# Altium PCB PCB1.PcbDoc
Units mil, origin at the board's own origin, x right, y up, seen from the top; angles counter-clockwise.
Board outline 2600 x 2600 mil, 4 copper layers (Top Layer, Layer 1, Layer 2, Bottom Layer), stack 68.756 mil thick; 22 components, 108 nets, 300 pads, 190 vias.
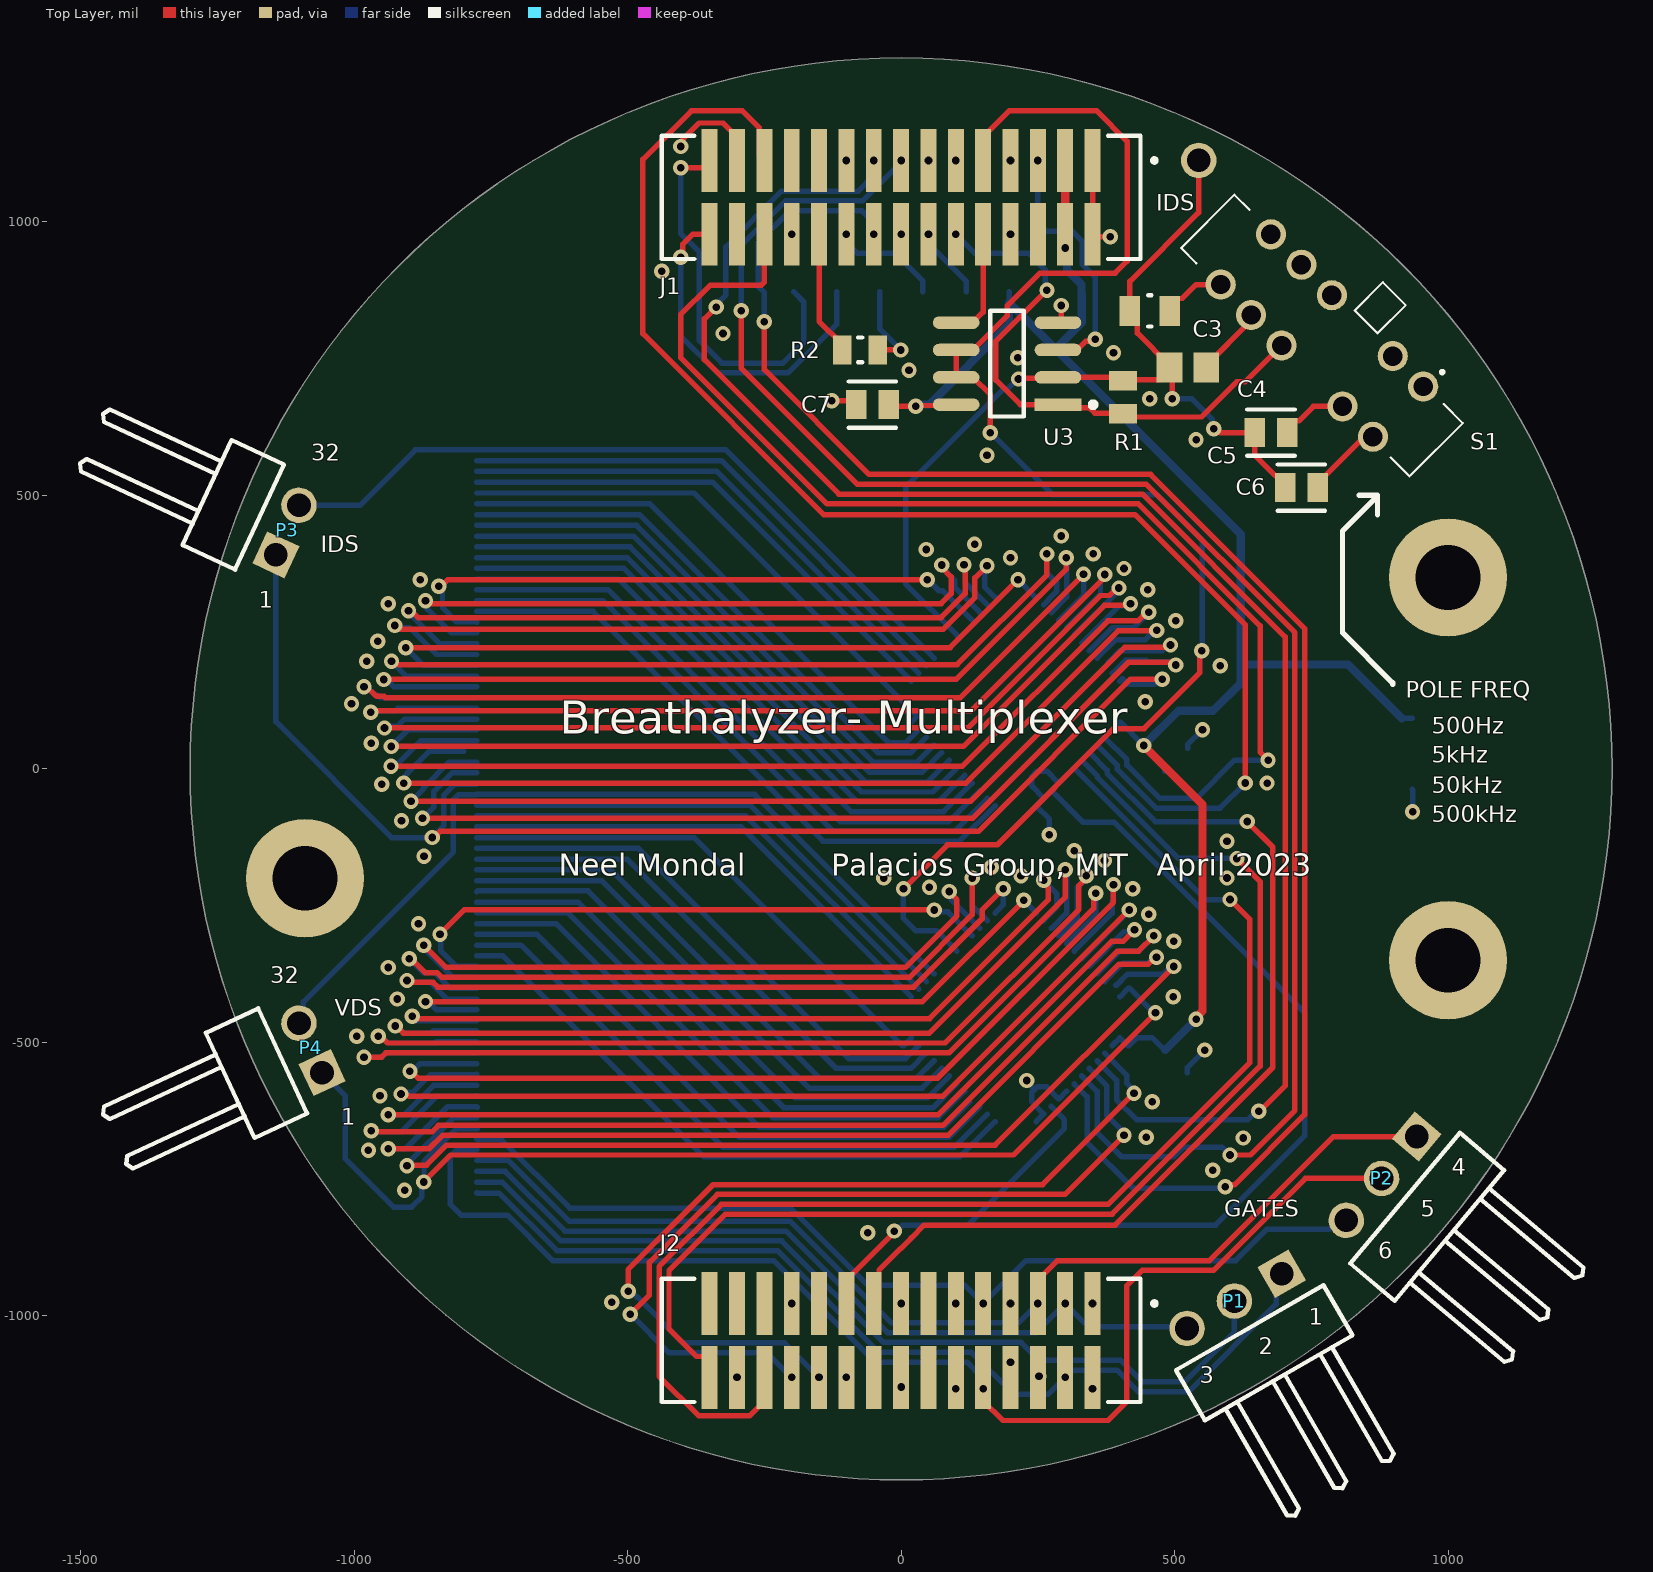
[diagram p0: Top Layer view]
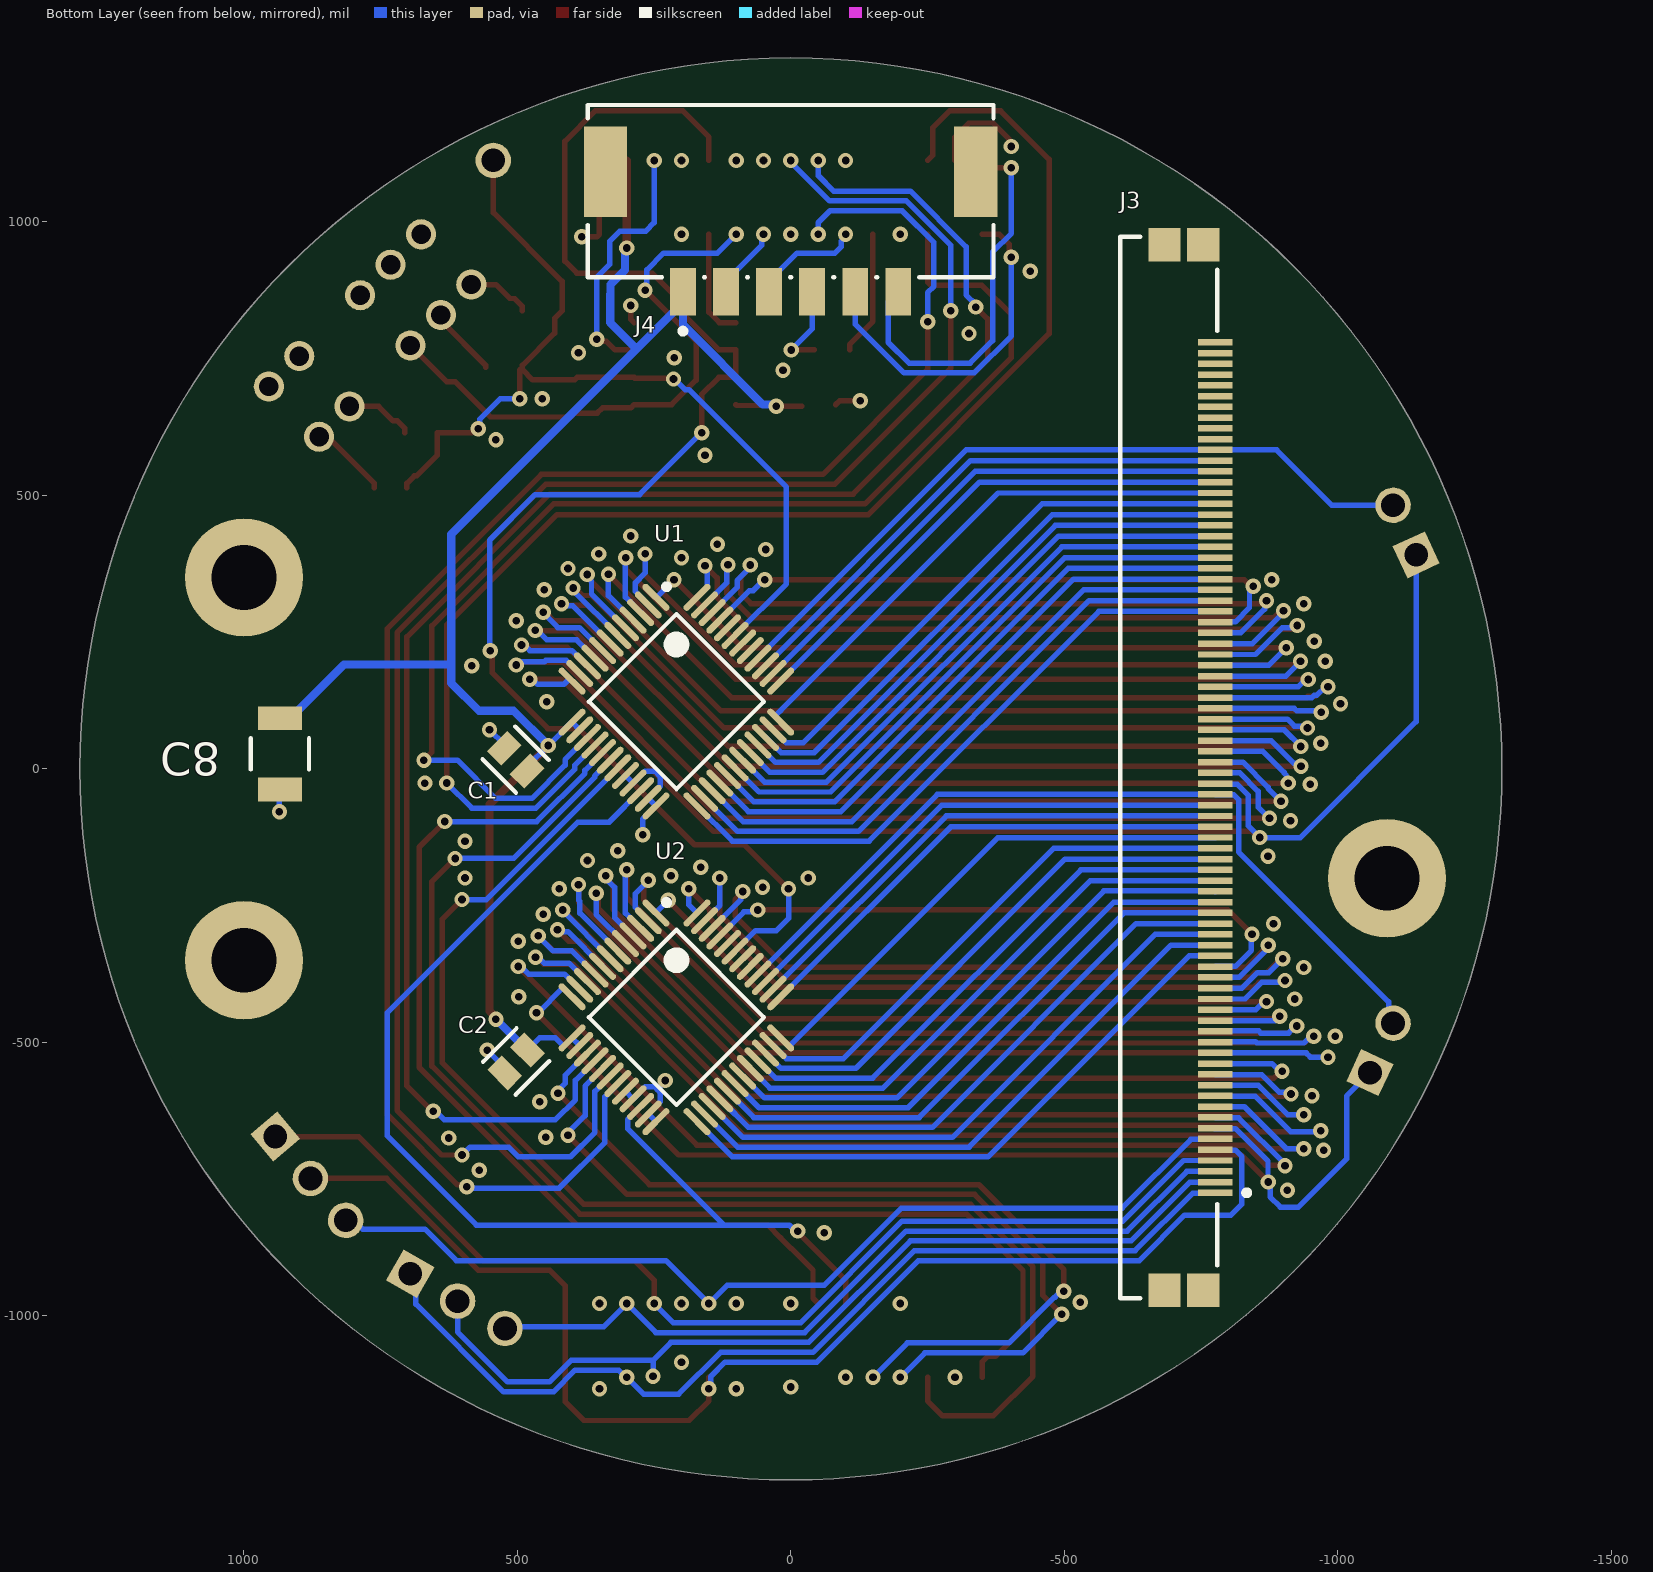
[diagram p1: Bottom Layer view, seen from below]
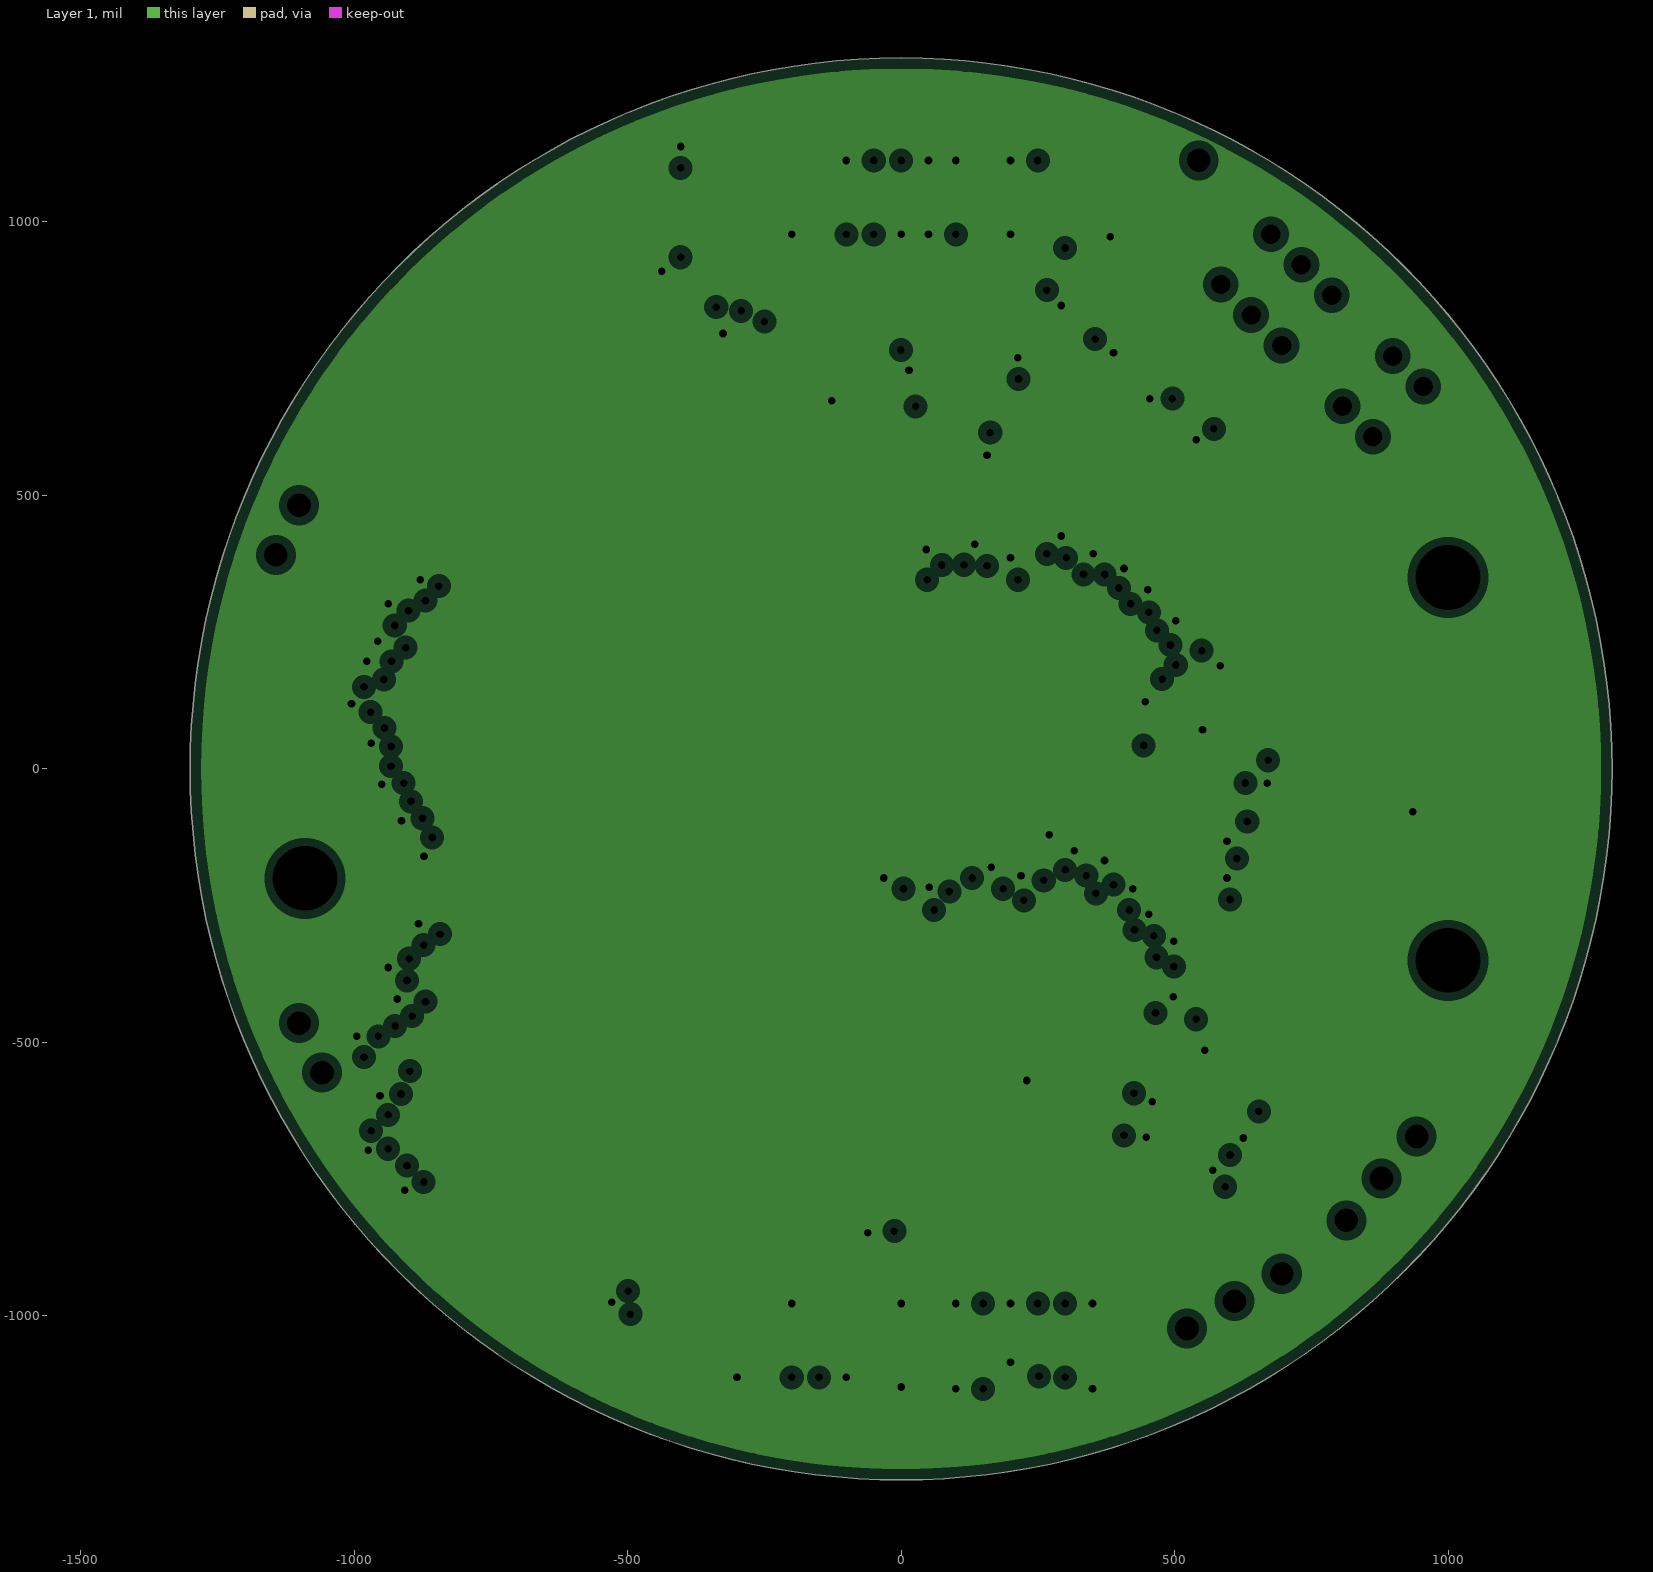
[diagram p2: Layer 1, clearances drawn from the general rule]
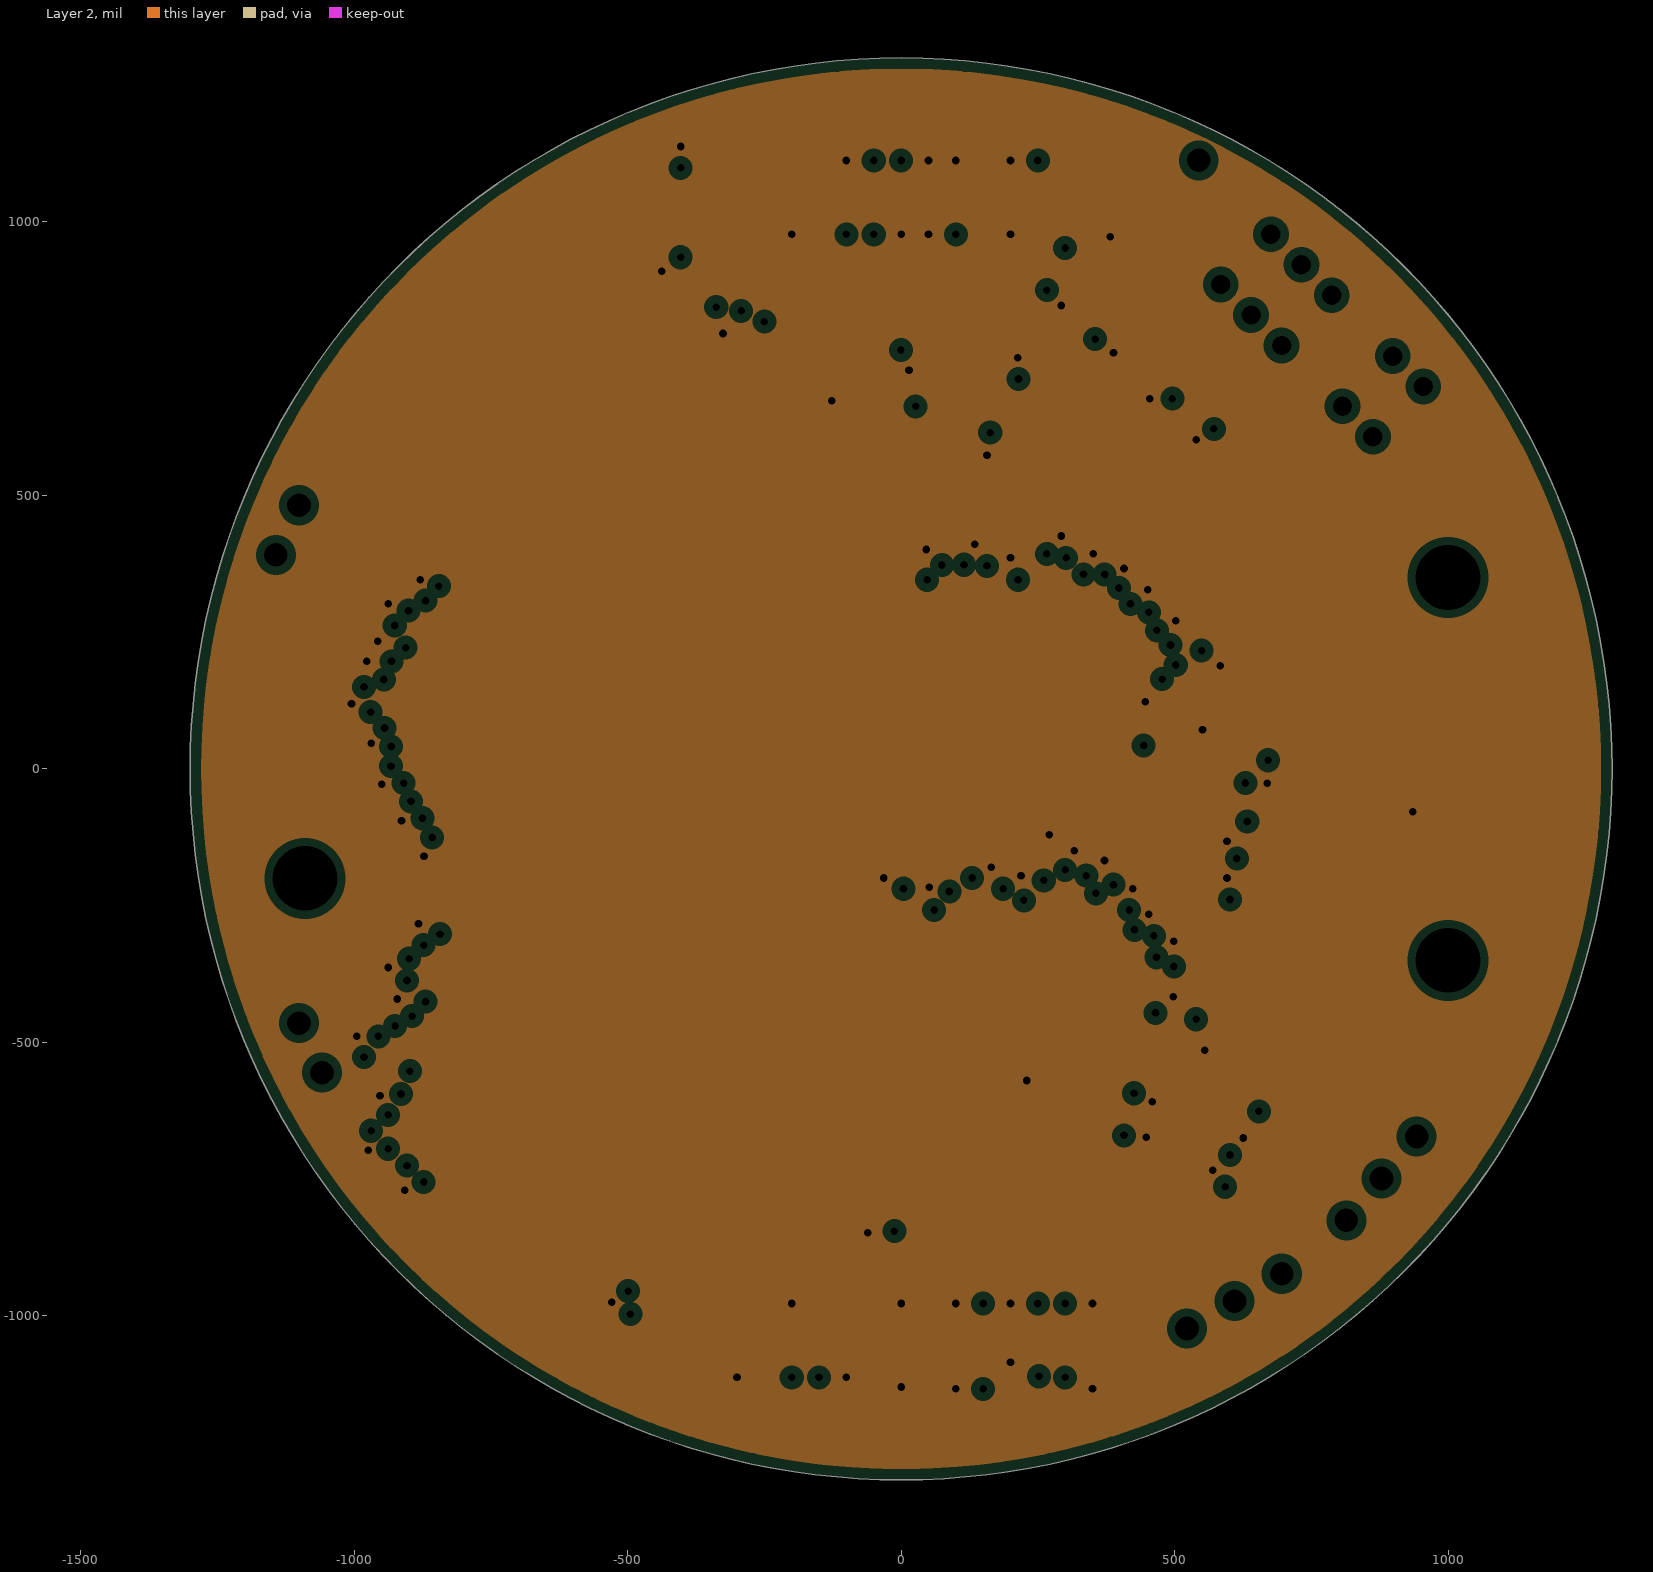
[diagram p3: Layer 2, clearances drawn from the general rule]
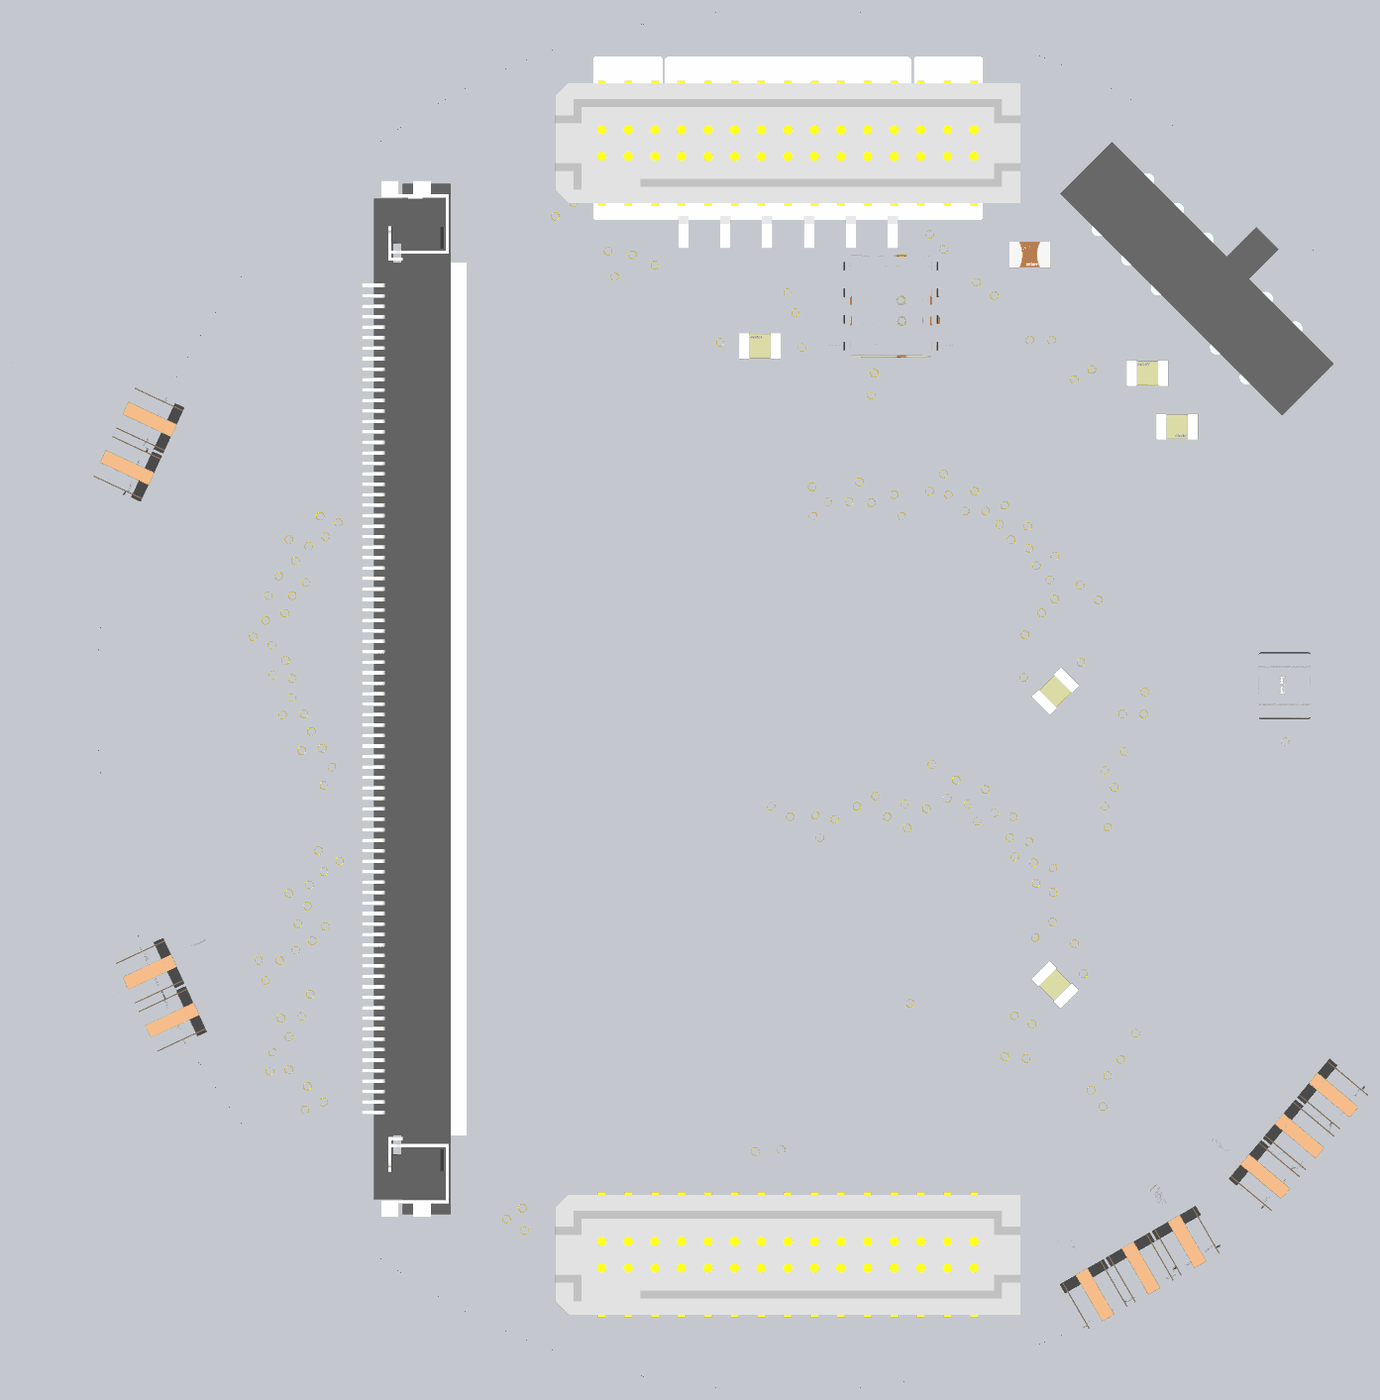
[diagram p4: 3D render of the assembled board from above, using the file's embedded part models]
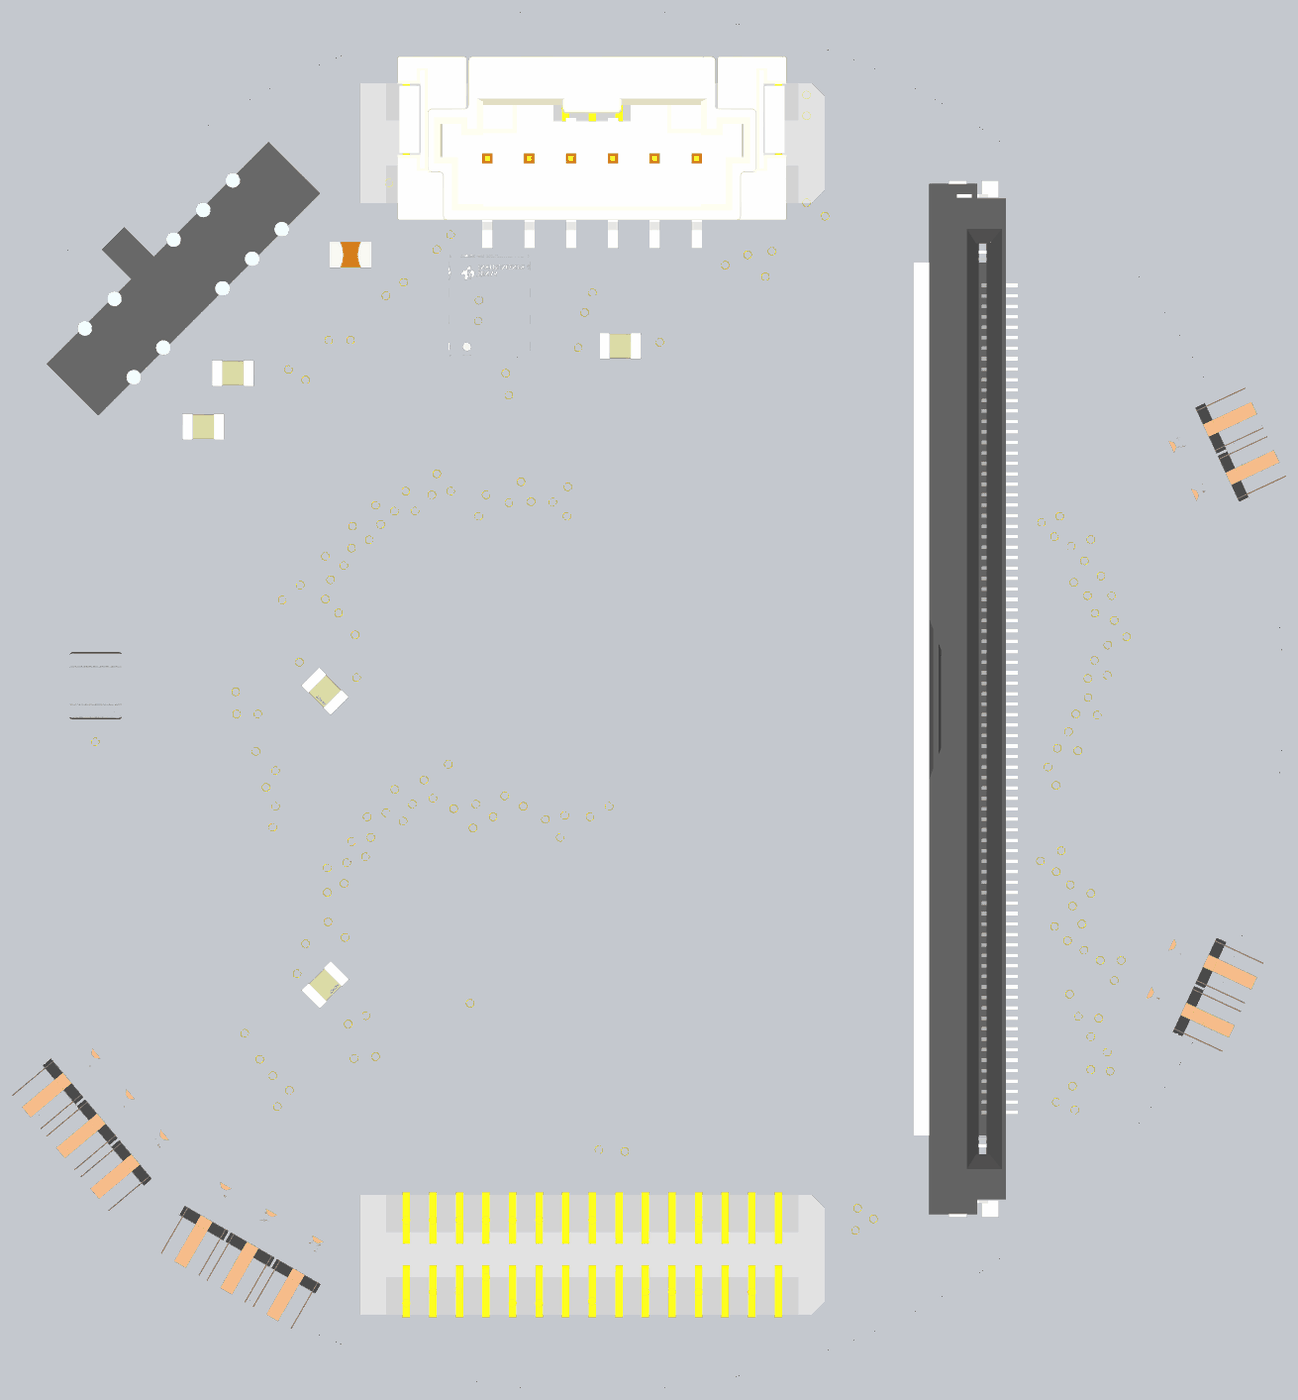
[diagram p5: 3D render of the assembled board from below, using the file's embedded part models]

## Layer stack, top to bottom
Top Solder: solder mask 0.5, Solder Resist, Dk 3.3
Top Layer: signal copper 0.7
Dielectric 1: prepreg 2.8, PP-006, Dk 4.1
Layer 1: plane copper 1.378, net GND
Dielectric1: core 59, FR-4, Dk 4.3
Layer 2: plane copper 1.378, net GND
Dielectric 2: prepreg 2.8, PP-006, Dk 4.1
Bottom Layer: signal copper 0.7
Bottom Solder: solder mask 0.5, Solder Resist, Dk 3.3

## Board outline
-1300,0 ccw(c0,0) 0,-1300 ccw(c0,0) 1300,0 ccw(c0,0) 0,1300 ccw(c0,0)

## Design rules (kind name [scope] priority, off if disabled: settings)
Clearance [All] p1: gap=8 ignorepadtopadclearanceinfootprint=FALSE except(6: Arc-SMDPad Track-SMDPad SMDPad-SMDPad; 12: Arc-Via Track-Via)
DiffPairsRouting [All] p1: maxlimit=10 minlimit=10 mostfreqgap=10 toplayer_minwidth=10 toplayer_maxwidth=10 toplayer_prefwidth=10 bottomlayer_minwidth=10 bottomlayer_maxwidth=10 bottomlayer_prefwidth=10 maxuncoupledlength=500
HoleSize [All] p1: absolutevalues=TRUE maxlimit=300 minlimit=14 maxpercent=80.000 minpercent=20.000
MinimumAnnularRing [All] p1: minimumring=7
MinimumSolderMaskSliver [All] p1: minsoldermaskwidth=0
PasteMaskExpansion [All] p1: expansion=10
PlaneClearance [All] p1: clearance=15
PlaneConnect [All] p1: pad.planeconnectstyle=Relief pad.reliefexpansion=20 pad.reliefentries=4 pad.reliefconductorwidth=10 pad.reliefairgap=10 via.planeconnectstyle=Direct via.reliefexpansion=20 via.reliefentries=4 via.reliefconductorwidth=10 via.reliefairgap=10
PolygonConnect [All] p1: thpad.connectstyle=Relief thpad.reliefconductorwidth=10 thpad.reliefentries=4 thpad.polygonreliefangle="90 Angle" thpad.airgapwidth=10 smdpad.connectstyle=Relief smdpad.reliefconductorwidth=10 smdpad.reliefentries=4 smdpad.polygonreliefangle="90 Angle" smdpad.airgapwidth=10 via.connectstyle=Direct via.reliefconductorwidth=10 via.reliefentries=4 via.polygonreliefangle="90 Angle" via.airgapwidth=10
RoutingVias [All] p1: holewidth=14 width=28 viastyle="Through Hole" minholewidth=14 minwidth=28 maxholewidth=14 maxwidth=28
SMDNeckDown [All] p1: percent=100.000
SilkToSolderMaskClearance SilkscreenOverComponentPads [IsPad] p1: minsilkscreentomaskgap=6 clearancetoexposedcopper=TRUE
SolderMaskExpansion [All] p1: expansion=10 istentingtop=FALSE
Width [All] p1: maxlimit=15 minlimit=8 preferedwidth=8
23 further rules are at their usual default settings.

## Components (designator, comment, footprint, x,y, rotation, side; value= is the part's Value field where it differs from the comment)
C1 "100 nF" FP-C0805C-DN-MFG 503.17,16.93 r45 bottom value="0.10 μF"
C2 "100 nF" FP-C0805C-DN-MFG 502.48,-535.01 r315 bottom value="0.10 μF"
C3 "330nF" FP-CC0805-0_85-MFG 454.89,837.55 r0 top value="330 nF"
C4 "33nF" CAPC2013X95X45NL10T25 524.49,734 r0 top
C5 "3.3nF" FP-C0805C-DN-MFG 676.21,614.89 r0 top value="3,300 pF"
C6 "330pF" FP-C0805C-DN-MFG 731.89,514.2 r180 top value="330 pF"
C7 "100 nF" FP-C0805C-DN-MFG -52.48,666 r0 top value="0.10 μF"
C8 "22uF" FP-GRM32-MFG 934.27,27.37 r270 bottom
J1 "TFM-115-02-L-D" SAMTEC_TFM-115-02-L-D 0,1045 r180 top locked
J2 "TFM-115-02-L-D" SAMTEC_TFM-115-02-L-D 0,-1045 r180 top locked
J3 "200485-0580" FP-200485-0580-MFG -690.96,2.49 r270 bottom locked
J4 "5600200620" FP-5600200620-MFG 0.58,1056.57 r0 bottom locked
P1 "DNP" 61300311021 663.97,-1067.6 r30 top locked
P2 "DNP" 61300311021 962,-819 r50 top locked
P3 "DNP" 61300211021 -1220.97,482.77 r245 top locked
P4 "DNP" 61300211021 -1178.71,-556.24 r295 top locked
R1 "1k" RESC2013X55X40LL15T20 405.85,679.55 r270 top
R2 "100" RESC2013X50X30LL20T20 -75.02,766 r180 top
S1 "SSSS212400" SSSS212400 954.6,699.09 r135 top locked
U1 "ADG732BSUZ-REEL" ADI-SU-48_N 209.3,123.04 r225 bottom
U2 "ADG732BSUZ-REEL" ADI-SU-48_N 209.3,-454.31 r225 bottom
U3 "OPA2388IDR" FP-D0008A-IPC_B 193.71,741 r180 top

## Footprints (in the part's own frame and the unit in brackets; to place one, negate y for a bottom-side part, rotate by r counter-clockwise, add the part's x,y. Pads: shape width x height; smd on the part's side, far side on the other; paste and mask are expansions set on the pad)
61300211021 [mm] "Pin Header, pitch 2.54 mm, THT, Angled, single row, 2p"
  rect 1.65x1.65 hole 1.1: 1(1.27,2.77)
  round 1.65 hole 1.1: 2(-1.27,2.77)
  silkscreen extent -2.69,-7.27 2.69,1.35, body extent -2.54,-7.27 2.54,3.09, height 2.58
61300311021 [mm] "Pin Header, pitch 2.54 mm, THT, Angled, single row, 3p"
  rect 1.65x1.65 hole 1.1: 1(2.54,2.77)
  round 1.65 hole 1.1: 2(0,2.77) 3(-2.54,2.77)
  silkscreen extent -3.96,-7.27 3.96,1.34, body extent -3.81,-7.27 3.81,3.09, height 2.58
ADI-SU-48_N [mm] "QFP, 48-Leads, Body 7x7mm, Pitch 0.5mm, IPC Medium Density"
  oval 1.65x0.3 smd: 1(-4.1,2.75) 2(-4.1,2.25) 3(-4.1,1.75) 4(-4.1,1.25) 5(-4.1,0.75) 6(-4.1,0.25) 7(-4.1,-0.25) 8(-4.1,-0.75) 9(-4.1,-1.25) 10(-4.1,-1.75) 11(-4.1,-2.25) 12(-4.1,-2.75) 25(4.1,-2.75) 26(4.1,-2.25) 27(4.1,-1.75) 28(4.1,-1.25) 29(4.1,-0.75) 30(4.1,-0.25) 31(4.1,0.25) 32(4.1,0.75) 33(4.1,1.25) 34(4.1,1.75) 35(4.1,2.25) 36(4.1,2.75)
  oval 0.3x1.65 smd: 13(-2.75,-4.1) 14(-2.25,-4.1) 15(-1.75,-4.1) 16(-1.25,-4.1) 17(-0.75,-4.1) 18(-0.25,-4.1) 19(0.25,-4.1) 20(0.75,-4.1) 21(1.25,-4.1) 22(1.75,-4.1) 23(2.25,-4.1) 24(2.75,-4.1) 37(2.75,4.1) 38(2.25,4.1) 39(1.75,4.1) 40(1.25,4.1) 41(0.75,4.1) 42(0.25,4.1) 43(-0.25,4.1) 44(-0.75,4.1) 45(-1.25,4.1) 46(-1.75,4.1) 47(-2.25,4.1) 48(-2.75,4.1)
  silkscreen extent -4.22,-2.88 2.88,3.57, body extent -3.5,-3.5 3.5,3.5, height 1.2
CAPC2013X95X45NL10T25 [mm] "Chip Capacitor, 2-Leads, Body 2.00x1.25mm, IPC Medium Density"
  rect 1.2x1.4 smd: 1(-0.85,0) 2(0.85,0)
  body extent -1.05,-0.67 1.05,0.67, height 0.95
FP-200485-0580-MFG [mm]
  rect 0.3x1.6 smd paste-1000 mask+0: 1(19.75,2.16) 2(19.25,2.16) 3(18.75,2.16) 4(18.25,2.16) 5(17.75,2.16) 6(17.25,2.16) 7(16.75,2.16) 8(16.25,2.16) 9(15.75,2.16) 10(15.25,2.16) 11(14.75,2.16) 12(14.25,2.16) 13(13.75,2.16) 14(13.25,2.16) 15(12.75,2.16) 16(12.25,2.16) 17(11.75,2.16) 18(11.25,2.16) 19(10.75,2.16) 20(10.25,2.16) 21(9.75,2.16) 22(9.25,2.16) 23(8.75,2.16) 24(8.25,2.16) 25(7.75,2.16) 26(7.25,2.16) 27(6.75,2.16) 28(6.25,2.16) 29(5.75,2.16) 30(5.25,2.16) 31(4.75,2.16) 32(4.25,2.16) 33(3.75,2.16) 34(3.25,2.16) 35(2.75,2.16) 36(2.25,2.16) 37(1.75,2.16) 38(1.25,2.16) 39(0.75,2.16) 40(0.25,2.16) 41(-0.25,2.16) 42(-0.75,2.16) 43(-1.25,2.16) 44(-1.75,2.16) 45(-2.25,2.16) 46(-2.75,2.16) 47(-3.25,2.16) 48(-3.75,2.16) 49(-4.25,2.16) 50(-4.75,2.16) 51(-5.25,2.16) 52(-5.75,2.16) 53(-6.25,2.16) 54(-6.75,2.16) 55(-7.25,2.16) 56(-7.75,2.16) 57(-8.25,2.16) 58(-8.75,2.16) 59(-9.25,2.16) 60(-9.75,2.16) 61(-10.25,2.16) 62(-10.75,2.16) 63(-11.25,2.16) 64(-11.75,2.16) 65(-12.25,2.16) 66(-12.75,2.16) 67(-13.25,2.16) 68(-13.75,2.16) 69(-14.25,2.16) 70(-14.75,2.16) 71(-15.25,2.16) 72(-15.75,2.16) 73(-16.25,2.16) 74(-16.75,2.16) 75(-17.25,2.16) 76(-17.75,2.16) 77(-18.25,2.16) 78(-18.75,2.16) 79(-19.25,2.16) 80(-19.75,2.16)
  rect 1.55x1.5 smd paste+0 mask+0: 81(-24.275,1.6) 82(24.275,1.6) 83(-24.275,-0.2) 84(24.275,-0.2)
  silkscreen extent -24.65,-2.26 24.65,3.74, body extent -24.74,-2.21 24.75,2.79, height 5.7
FP-5600200620-MFG [mm]
  rect 1.2x2.2 smd paste+0 mask+0: 1(5,4.68) 2(3,4.68) 3(1,4.68) 4(-1,4.68) 5(-3,4.68) 6(-5,4.68)
  rect 2x4.2 smd paste+0 mask+0: 7(-8.6,-0.9) 8(8.6,-0.9)
  silkscreen extent -9.43,-4 9.43,6.63, body extent -9.3,-3.9 9.3,5.25, height 8.2
FP-C0805C-DN-MFG [mm]
  rect 0.95x1.35 smd paste+0 mask+0: 1(-0.75,0) 2(0.75,0)
  silkscreen extent -1.1,-1.07 1.1,1.08, body extent -1,-0.62 1,0.63, height 0.88
FP-CC0805-0_85-MFG [mm]
  rect 0.95x1.4 smd paste+0 mask+0: 1(-0.925,0) 2(0.925,0)
  silkscreen extent -0.08,-0.72 0.08,0.72, body extent -1.6,-1.05 1.6,1.05, height 0.25
FP-D0008A-IPC_B [mil]
  rect 85.4x22.92 smd paste+0 mask+0: 1(-93.06,75)
  rrect100% 85.4x22.92 smd paste+0 mask+0: 2(-93.06,25) 3(-93.06,-25) 4(-93.06,-75) 5(93.06,-75) 6(93.06,-25) 7(93.06,25) 8(93.06,75)
  silkscreen extent -162,-97 31,97, body extent -146,-106 146,106, height 10
FP-GRM32-MFG [mm]
  rect 1.1x2.05 smd paste+0 mask+0: 1(-1.65,0) 2(1.65,0)
  silkscreen extent -0.72,-1.35 0.72,1.35, body extent -1.6,-1.25 1.6,1.25, height 2.7
RESC2013X50X30LL20T20 [mm] "Chip Resistor, 2-Leads, Body 2.00x1.25mm, IPC High Density"
  rect 0.85x1.35 smd: 1(-0.825,0) 2(0.825,0)
  silkscreen extent -0.1,-0.58 0.1,0.58, body extent -1.1,-0.73 1.1,0.73, height 0.5
RESC2013X55X40LL15T20 [mm] "Chip Resistor, 2-Leads, Body 2.00x1.25mm, IPC High Density"
  rect 0.9x1.3 smd: 1(-0.775,0) 2(0.775,0)
  body extent -1.07,-0.7 1.07,0.7, height 0.55
SAMTEC_TFM-115-02-L-D [mm]
  rect 0.74x2.92 smd: 01(-8.89,-1.715) 02(-8.89,1.715) 03(-7.62,-1.715) 04(-7.62,1.715) 05(-6.35,-1.715) 06(-6.35,1.715) 07(-5.08,-1.715) 08(-5.08,1.715) 09(-3.81,-1.715) 10(-3.81,1.715) 11(-2.54,-1.715) 12(-2.54,1.715) 13(-1.27,-1.715) 14(-1.27,1.715) 15(0,-1.715) 16(0,1.715) 17(1.27,-1.715) 18(1.27,1.715) 19(2.54,-1.715) 20(2.54,1.715) 21(3.81,-1.715) 22(3.81,1.715) 23(5.08,-1.715) 24(5.08,1.715) 25(6.35,-1.715) 26(6.35,1.715) 27(7.62,-1.715) 28(7.62,1.715) 29(8.89,-1.715) 30(8.89,1.715)
  silkscreen extent -11.87,-2.86 11.11,2.86, body extent -11.11,-3.05 11.11,2.92, height 5.71
SSSS212400 [mm]
  round 1.4 hole 0.9: 1(0,0) 2(2,0) 3(6,0) 4(8,0) 5(10,0) 6(0,3.3) 7(2,3.3) 8(6,3.3) 9(8,3.3) 10(10,3.3)
  silkscreen extent -2.5,-2.1 12.5,3.4, body extent -2.5,-2.1 12.5,3.65, height 3.6

## Part data
C1 C2 C7: library part CMP-2007-00279-2, "CAP CER 0.1UF 50V X7R 0805", Capacitance="0.10 μF", Manufacturer=KEMET, Manufacturer Part Number=C0805C104K5RACTU, Package=C0805C-DN, Temperature="-55°C to +125°C", Temperature Characteristic=X7R, Temperature Coefficient=30ppm/°C, Temperature Range High=+125°C, Temperature Range Low=-55°C, Tolerance=0.1, Voltage Rating="50 V", Automotive=No, Category=Cap, ComponentLink2Description=Datasheet, ComponentLink2URL=https://content.kemet.com/datasheets/KEM_C1003_C0G_SMD.pdf, Device Class L1="Passive Components", Device Class L2=Capacitors, Device Class L3="Ceramic Capacitors", Digikey Description="CAP CER 0.1UF 50V X7R 0805", Height=0.88mm, Ipc Land Pattern Name=CAPC200125X78, Lead Free=Yes, Material=Ceramic, Mouser Description="Cap Ceramic 0.1uF 50V X7R 10% SMD 2.0 x 1.2 mm 125 C Paper T/R", Octopart=https://octopart.com/c0805c104k5ractu-kemet-143926, RoHS=TRUE
C3: library part CMP-03422-000882-1, "Surface Mount Ceramic Multilayer Capacitor 0.33uF 10% X7R 16V 0805 Blister T/R", Capacitance="330 nF", Manufacturer=Yageo, Manufacturer Part Number=CC0805KKX7R7BB334, Package=CC0805-0.85, Temperature="-30°C to +85°C", Temperature Characteristic=X7R, Temperature Range High=+85°C, Temperature Range Low=-30°C, Tolerance=0.1, Voltage Rating="16 V", Automotive=No, Category=Cap, ComponentLink2Description=Datasheet, ComponentLink2URL=http://www.yageo.com/documents/recent/UPY-GPHC_Y5V_6.3V-to-50V_8.pdf, Device Class L1="Passive Components", Device Class L2=Capacitors, Device Class L3="Ceramic Capacitors", Digikey Description="Surface Mount Ceramic Multilayer Capacitor 0.33uF 10% X7R 16V 0805 Blister T/R", Footprint Url=http://www.yageo.com/exep/pages/download/literatures/UPY-C_GEN_24.pdf, Height=0.95mm, Ipc Land Pattern Name=CAPC200125X85, Lead Free=Yes, Material=Ceramic, Mouser Description="Multilayer Ceramic Capacitors MLCC - SMD/SMT 330nF 16V X7R 10%", Octopart=https://octopart.com/cc0805kkx7r7bb334-yageo-42334127, RoHS=TRUE
C4: library part CMP-1036-04169-2, Manufacturer=Murata, Part Number=GRM219R71H333KA01D
C5: library part CMP-2007-00373-2, "CAP CER 3300PF 50V X7R 0805", Capacitance="3,300 pF", Manufacturer=KEMET, Manufacturer Part Number=C0805C332K5RACTU, Package=C0805C-DN, Temperature="-55°C to +125°C", Temperature Characteristic=X7R, Temperature Coefficient=30ppm/°C, Temperature Range High=+125°C, Temperature Range Low=-55°C, Tolerance=0.1, Voltage Rating="50 V", Automotive=No, Category=Cap, ComponentLink2Description=Datasheet, ComponentLink2URL=https://content.kemet.com/datasheets/KEM_C1003_C0G_SMD.pdf, Device Class L1="Passive Components", Device Class L2=Capacitors, Device Class L3="Ceramic Capacitors", Digikey Description="CAP CER 3300PF 50V X7R 0805", Height=0.88mm, Ipc Land Pattern Name=CAPC200125X78, Lead Free=Yes, Material=Ceramic, Mouser Description="Multilayer Ceramic Capacitors MLCC - SMD/SMT 50volts 3300pF X7R 10%", Octopart=https://octopart.com/c0805c332k5ractu-kemet-90782, RoHS=TRUE
C6: library part CMP-2007-00598-2, "CAP CER 330PF 50V C0G/NP0 0805", Capacitance="330 pF", Manufacturer=KEMET, Manufacturer Part Number=C0805C331J5GACTU, Package=C0805C-DN, Temperature="-55°C to +125°C", Temperature Characteristic=C0G, Temperature Coefficient=30ppm/°C, Temperature Range High=+125°C, Temperature Range Low=-55°C, Tolerance=0.05, Voltage Rating="50 V", Automotive=No, Category=Cap, ComponentLink2Description=Datasheet, ComponentLink2URL=https://content.kemet.com/datasheets/KEM_C1003_C0G_SMD.pdf, Device Class L1="Passive Components", Device Class L2=Capacitors, Device Class L3="Ceramic Capacitors", Digikey Description="CAP CER 330PF 50V C0G/NP0 0805", Height=0.88mm, Ipc Land Pattern Name=CAPC200125X78, Lead Free=Yes, Material=Ceramic, Mouser Description="Ceramic Capacitor 330Pf 50V, C0G, 5%, 0805, Full Reel", Octopart=https://octopart.com/c0805c331j5gactu-kemet-85885, RoHS=TRUE
C8: library part CMP-2000-05458-2, "CAP CER 22UF 25V X5R 1210", Manufacturer="Murata Electronics North America", Manufacturer Part Number=GRM32ER61E226KE15L, Operating Temperature="-55°C ~ 85°C", Package=GRM32, Package / Case="1210 (3225 Metric)", Standard Package=1,000, Temperature="-55°C to +85°C", Temperature Characteristic=X5R, Temperature Range High=+85°C, Temperature Range Low=-55°C, Tolerance=10%, Voltage - Rated=25V, Applications="General Purpose", Automotive=No, Capacitance=22uF, Category=Cap, ComponentLink2Description=Datasheet, ComponentLink2URL=https://search.murata.co.jp/Ceramy/image/img/A01X/G101/ENG/GRM32ER61E226KE15-01A.pdf, Device Class L1="Passive Components", Device Class L2=Capacitors, Device Class L3="Ceramic Capacitors", Digikey Description="CAP CER 22UF 25V X5R 1210", Height=2.7mm, Lead Free=Yes, Material=Ceramic, Mounting Type="Surface Mount, MLCC", Mouser Description="Multilayer Ceramic Capacitors MLCC - SMD/SMT 1210 22uF 25volts X5R 10%", Octopart=https://octopart.com/grm32er61e226ke15l-murata-197441, Other Names=490-3889-2, Packaging="Cut Tape (CT)", Possible Substitute=GRM32ER61E226KE15K, RoHS=TRUE, Size / Dimension="0.126\" L x 0.098\" W (3.20mm x 2.50mm)", Temperature Coefficient=X5R, Thickness (Max)="0.106\" (2.70mm)", Voltage Rating=25V
J1 J2: Package=None, Availability=Unavailable, MF="Samtec Inc.", MP=TFM-115-02-L-D, Price=None, System=Connector
J3: library part CMP-04775-000018-1, "0.5 ONE-TOUCH ST 80P", System=Connector
J4: library part CMP-04776-000066-1, "CONN HEADER SMD 6POS 2MM", Current Rating=3A, Manufacturer=Molex, Temperature="-40°C to +125°C", Temperature Range High=+125°C, Temperature Range Low=-40°C, Voltage Rating=125V, Automotive=No, Category=Conn, ComponentLink2Description=Datasheet, ComponentLink2URL=https://www.molex.com/webdocs/datasheets/pdf/en-us/5600200320_PCB_HEADERS.pdf, Conn Gender=Male, Conn Orientation=Vertical, Contact Material=Tin,Nickel, Device Class L1=Connectors, Device Class L2="Headers and Wire Housings", Device Class L3=unset, Digikey Description="CONN HEADER SMD 6POS 2MM", Footprint Url=https://www.molex.com/pdm_docs/sd/5600200320_sd.pdf, Height=8.2mm, Lead Free=Yes, Manufacturer Part Number=5600200620, Number of Contacts=6, Number of Rows=1, Octopart=https://octopart.com/5600200620-molex-51767481, Package=5600200620, Pitch=2mm, RoHS=TRUE
P1 P2: library part CMP-1502-01061-1, "THT Angled Pin Header WR-PHD, Pitch 2.54 mm, Single Row, 3 pins", Contact Resistance=20mOhm, Manufacturer="Wurth Elektronik", Operating Temperature=-40to105degC, Package Reference=61300311021, Rated Current=3A, Withstanding Voltage=500VAC, Working Voltage=250VAC, Datasheet URL=https://katalog.we-online.de/em/datasheet/6130xx11021.pdf, Gender=Male, Manufacturer URL=http://www.we-online.de, Mounting Technology=THT, Orientation=Angled, Packaging=Bag, Part Number=61300311021, Pin Number=3, Pitch=2.54mm, Publisher=WurthElektronik, Row Number=Single
P3 P4: library part CMP-1502-01059-1, "THT Angled Pin Header WR-PHD, Pitch 2.54 mm, Single Row, 2 pins", Contact Resistance=20mOhm, Manufacturer="Wurth Elektronik", Operating Temperature=-40to105degC, Package Reference=61300211021, Rated Current=3A, Withstanding Voltage=500VAC, Working Voltage=250VAC, Datasheet URL=https://katalog.we-online.de/em/datasheet/6130xx11021.pdf, Gender=Male, Manufacturer URL=http://www.we-online.de, Mounting Technology=THT, Orientation=Angled, Packaging=Bag, Part Number=61300211021, Pin Number=2, Pitch=2.54mm, Publisher=WurthElektronik, Row Number=Single
R1: library part CMP-2001-04738-1, "TNPW08051K00BEEN", Manufacturer="Vishay Dale", Part Number=TNPW08051K00BEEN
R2: library part CMP-2001-04901-1, Manufacturer="Vishay Dale", Part Number=CRCW0805100RFKEA
S1: "Switch", Manufacturer_Name="ALPS Electric", Mouser Part Number=688-SSSS212400, Datasheet Link=https://www.alps.com/prod/info/E/HTML/Switch/Slide/SSSS2/SSSS224100.html, Height=3.5mm, Manufacturer_Part_Number=SSSS212400, Mouser Price/Stock=https://www.mouser.com/Search/Refine.aspx?Keyword=688-SSSS212400
U1 U2: library part CMP-0798-00236-1, "1.8 to 5.5 V / +/-2.5 V, 4 Ohm, 32-Channel Analog Multiplexer, -40 to 85 degC, 48-pin QFP (SU-48), Reel", Manufacturer="Analog Devices", Bandwidth (Hz)=18M, Code_JEDEC=MS-026ABC, ComponentLink1Description="Manufacturer URL", ComponentLink1URL=http://www.analog.com/en/index.html, ComponentLink2Description=Datasheet, ComponentLink2URL=http://www.analog.com/static/imported-files/data_sheets/ADG726_732.pdf, ComponentLink3Description="Package Specification", ComponentLink3URL=http://www.analog.com/static/imported-files/packages/470644706845302410119987SU48_7x7.pdf, DatasheetVersion="Rev. 0", Max Analog Signal Range="Vss to Vdd", Mounting Technology="Surface Mount", PackageDescription="48-Pin Thin Plastic Quad Flat Package, Body 7 x 7 mm, Pitch 0.5 mm", PackageReference=SU-48, Packing=Reel, PartNumber=ADG732BSUZ-REEL, Ron (ohms)=4, Supply V Guar Performance="Dual_(+/-2.5V), Single_(+3V), Single_(+5V)", t transition (s)=23n
U3: library part CMP-04895-000483-1, "IC OPAMP ZER-DRIFT 2CIRC 8SOIC", Max Operating Temperature=125°C, Min Operating Temperature=-40°C, Number of Channels=2, RoHS Compliant=Yes

## Free pads (board coordinates)
  round 65 hole 43: 3(544.17,1112.52)
  round 216.54 hole 118.11: 4(-1090,-200) 4(1000,-350) 4(1000,350)

## Via types
v1: diameter 28, hole 14, Top Layer to Bottom Layer, tented both sides, 189 vias
v2: diameter 28, hole 14, Top Layer to Bottom Layer, 1 vias

## Nets (pads, with @x,y where several pads share a name; then routed paths per layer and width w, separated by ;. In a path a pad name is that pad's centre, name@x,y a point inside that pad or via, vN(x,y) a via of type N, cw(c..) or ccw(c..) an arc to the next point about the centre after c; other vN are vias at no path point)
1V_REF: J1.05 U3.3 | length 474.4
  Top Layer w10: U3.3 321.5,766 337.74,782.24 351.41,782.24 v1(354.86,785.68)
  Bottom Layer w10: v1(250,1112.52) 250,998.71 265.29,983.43 312.84,983.43 331,965.27 331,922.9 354.86,899.04 v1(354.86,785.68)
2V_REF: J1.06
3V3: C1.1 C2.1 C7.2 C8.1 J1.03 J1.04 J4.1 U1.13 U1.14 U2.13 U2.14 U3.8 | length 3138.8
  Top Layer w10: C7.2@-19.86,662.9 v1(26.53,662.9) 28.08,664.45 99.1,664.45 U3.8 ; v1(539.36,-457.79) v1@539.36,-454.58
  Top Layer w15: v1(300,952.43) J1.03 ; v1(443.58,42.73) 551.01,-64.69 551.01,-442.93 v1@539.36,-454.58
  Bottom Layer w10: v1(26.53,662.9) v1@29.97,666.35 ; J4.1@197.43,852.63 J4.1 ; v1(300,952.43) v1@303.44,948.98 ; 329.8,868.6 330.4,868 ; U2.14 U2.13 414.66,-506.56 415.84,-506.56 430.51,-491.89 459.36,-491.89 C2.1 C2.1@483.03,-514.13 ; U1.14 U1.13 400.85,85.46 v1(443.58,42.73) 482.29,4.02 C1.1 ; C8.1@915.56,92.33 C8.1
  Bottom Layer w15: v1@29.97,666.35 51.55,666.35 197.43,812.23 197.43,852.63 621.09,428.97 621.09,190.69 ; 282.15,767.91 330.4,816.17 330.4,868 ; v1@303.44,948.98 303.44,912.12 329.8,885.77 329.8,868.6 ; v1(443.58,42.73) 507.18,106.33 570.21,106.33 621.09,157.21 621.09,190.69 ; C2.1@483.03,-514.13 v1(539.36,-457.79) ; C8.1@915.56,92.33 817.21,190.69 621.09,190.69
5KHZ_POLE: C4.2 S1.9 | length 129.9
  Top Layer w10: C4.2 557.95,737.94 640.02,820.01 S1.9
50KHZ_POLE: C5.2 S1.7 | length 125.8
  Top Layer w10: C5.2 705.74,622.76 719.44,636.46 727.31,636.46 753.75,662.9 S1.7
500HZ_POLE: C3.2 S1.10 | length 118.1
  Top Layer w10: C3.2 491.31,846.41 505.01,860.11 513.87,860.11 539.36,885.61 S1.10
500KHZ_POLE: C6.1 S1.6 | length 144.5
  Top Layer w10: C6.1 761.42,522.08 837.93,598.59 854.1,598.59 S1.6
!ADC_CS: J1.21
!BME_CS: J1.29 J4.6 | length 714.4
  Top Layer w10: v1(-402.99,1099) -359.57,1099 -350,1108.57 J1.29
  Bottom Layer w10: v1(-402.99,1099) -402.99,979.34 -369,945.34 -369,783.27 -327.73,742 -216,742 -178,780 -178,854.05 J4.6
!CHIP_EN: J2.19 U1.22 U2.22 | length 2147.8
  Top Layer w10: J2.19 -100,-934.57 -12.4,-846.96 v1(-12.4,-845.1)
  Bottom Layer w10: v1(-12.4,-845.1) -7.99,-845.1 3.03,-834.08 122.13,-834.08 ; U2.22 274.72,-617.66 298.5,-641.43 298.5,-657.71 122.13,-834.08 ; U1.22 332.13,-97.22 389.7,-97.22 738.02,-445.54 738.02,-670.97 574.91,-834.08 122.13,-834.08
!DAC_CS: J1.23
!GATE_SHDN: J1.28
+11V: J2.13
-11V: J2.14
DRAIN_SEL0: J2.22 U2.15 | length 1607.8
  Top Layer w10: v1(-499,-955) -499,-915.62 -343.48,-760.1 258.93,-760.1 v1(425.97,-593.05)
  Bottom Layer w10: v1(-499,-955) -494.13,-955 -483.24,-965.89 -482.25,-965.89 -398.54,-1049.6 -212.92,-1049.6 v1(-150,-1112.52) ; U2.15 412.26,-559.83 412.26,-574.47 425.97,-588.18 v1(425.97,-593.05)
DRAIN_SEL1: J1.17 U2.16 | length 3102.1
  Top Layer w10: v1(-338,844.41) -359.57,822.85 -359.57,748.38 -113.62,502.43 441.2,502.43 702.02,241.61 702.02,-579.43 655.3,-626.16 v1(654.13,-626.16)
  Bottom Layer w10: v1(-338,844.41) -338,849.28 -320.45,866.83 -320.45,954.57 -218.46,1056.57 -78.06,1056.57 -50,1084.62 v1(-50,1112.52) ; U2.16 394.26,-569.67 394.26,-605.18 430.51,-641.43 633.98,-641.43 649.26,-626.16 v1(654.13,-626.16)
DRAIN_SEL2: J2.24 U2.17 | length 1564.8
  Top Layer w10: v1(-495.09,-996.89) -460.38,-962.18 -460.38,-902.45 -336.03,-778.1 299.59,-778.1 v1(407.69,-670)
  Bottom Layer w10: v1(-495.09,-996.89) -424.38,-1067.6 -244.92,-1067.6 v1(-200,-1112.52) ; U2.17 344.32,-548.06 376.26,-580 376.26,-633.79 407.69,-665.22 v1(407.69,-670)
DRAIN_SEL3: J1.15 U2.18 | length 3211.5
  Top Layer w10: v1(-292.34,837.55) -292.34,732.8 -79.98,520.43 448.65,520.43 720.02,249.06 720.02,-624.51 638.53,-706 v1(601.3,-706)
  Bottom Layer w10: v1(-292.34,837.55) -292.34,957.22 -211,1038.57 -70.6,1038.57 0,1109.17 v1(0,1112.52) ; U2.18 330.4,-561.98 358.26,-589.84 358.26,-664.41 403.44,-709.59 498.14,-709.59 516.14,-691.59 586.44,-691.59 600.85,-706 v1(601.3,-706)
DRAIN_SEL4: J1.18 U2.19 | length 3181.6
  Top Layer w10: v1(-250,817.87) -250,730.06 -58.37,538.43 456.11,538.43 738.02,256.52 738.02,-631.96 609.43,-760.56 596.04,-760.56 v1(592.59,-764)
  Bottom Layer w10: v1(-250,817.87) -250,870.82 -261.34,882.17 -261.34,962.77 -203.54,1020.57 -71.85,1020.57 -50,998.71 v1(-50,977.48) ; U2.19 316.48,-575.9 340.26,-599.68 340.26,-683.38 423.66,-766.78 589.81,-766.78 v1(592.59,-764)
GATE1: J2.04 J3.1 P1.1 | length 1783.1
  Bottom Layer w10: J3.1 -775.09,-775.98 -734.57,-775.98 -629.54,-881 -225.74,-881 -40,-1066.73 128.61,-1066.73 205.1,-1143.22 269.3,-1143.22 v1(300,-1112.52) 301.63,-1112.52 314.86,-1099.3 394.36,-1099.3 434.04,-1138.98 525.43,-1138.98 685.69,-978.72 685.69,-968.38 686.23,-967.84 686.23,-911.81 P1.1@685.69,-911.27
GATE2: J2.06 J3.2 P1.2 | length 1653.8
  Bottom Layer w10: J3.2 -775.8,-755.58 -729.5,-755.58 -622.09,-863 -218.28,-863 -32.55,-1048.73 219.34,-1048.73 252.04,-1081.43 ; v1(252.04,-1110.48) 252.04,-1081.43 ; P1.2@614.98,-981.98 609.44,-987.51 609.44,-1029.51 517.98,-1120.98 441.49,-1120.98 401.81,-1081.3 307.4,-1081.3 307.27,-1081.43 252.04,-1081.43
GATE3: J2.03 J3.3 P1.3 | length 1459.6
  Bottom Layer w10: J3.3 -723.93,-735.7 -614.63,-845 -210.83,-845 -25.09,-1030.73 246.75,-1030.73 v1(300,-977.48) 342.61,-1020.09 511.67,-1020.09 P1.3@518.79,-1027.21
GATE4: J2.05 J3.4 P2.1 | length 2007.8
  Top Layer w10: v1(250,-977.48) 250,-934.57 285.57,-899 563.83,-899 790.53,-672.3 P2.1
  Bottom Layer w10: J3.4 -718.16,-716.02 -607.18,-827 -203.37,-827 -17.64,-1012.73 214.75,-1012.73 v1(250,-977.48)
GATE5: J2.10 J3.5 P2.2 | length 2360.3
  Top Layer w10: J2.10 v1(150,-1133.5) 150,-1155.43 185.98,-1191.41 378.45,-1191.41 412.26,-1157.6 412.26,-945.34 440.6,-917 571.28,-917 739.38,-748.9 P2.2
  Bottom Layer w10: J3.5 -776.78,-697.11 -812.88,-697.11 -824.67,-708.9 -824.67,-795.74 -804.44,-815.97 -720.03,-815.97 -637,-899 -233.19,-899 -47.46,-1084.73 120.18,-1084.73 146.56,-1111.11 146.56,-1130.06 v1(150,-1133.5)
GATE6: J2.09 J3.6 P2.3 | length 1777.7
  Bottom Layer w10: J3.6 -775.22,-677.43 -731.3,-677.43 -605.72,-803 -201.91,-803 -61.13,-943.79 116.31,-943.79 v1(150,-977.48) 228.48,-899 611.67,-899 669.18,-841.49 783.32,-841.49 799.31,-825.51 P2.3
GATE_AMP: J2.21
GND: C1.2 C2.2 C7.1 C8.2 J1.01 J1.02 J1.07 J1.08 J1.11 J1.13 J1.14 J1.16 J1.19 J1.24 J1.27 J2.01 J2.02 J2.07 J2.08 J2.11 J2.12 J2.15 J2.16 J2.20 J2.23 J2.28 J4.2 U1.20 U1.21 U1.23 U1.24 U2.20 U2.21 U2.23 U2.24 U3.4 | length 1092.2
  Top Layer w10: v1(-402.99,1138) -399.55,1141.44 -399.55,1150.57 -369.12,1181 -325.57,1181 -300,1155.43 J1.27 ; v1(-127,673) -89.01,673 C7.1 ; U3.4 292.69,821.93 v1(292.69,847.4) ; J1.01 J1.02 354.52,972.96 v1(382.47,972.96)
  Bottom Layer w10: v1(50,977.48) 53.44,974.04 53.44,957.25 118.69,892 J4.2 ; v1(229.82,-569.81) 229.82,-572.26 243.98,-586.42 ; U2.24 U2.23 260.8,-630.6 239.03,-608.82 239.03,-591.37 243.98,-586.42 ; v1(270.9,-120.37) 270.9,-91.67 U1.24 U1.23 260.8,-53.24 239.03,-31.47 239.03,-14.02 248.93,-4.12 266.37,-4.12 288.15,-25.9 U1.21 U1.20 ; U2.20 U2.21 288.15,-603.25 266.37,-581.47 248.93,-581.47 243.98,-586.42 ; C2.2 523.36,-546.2 v1(555.43,-514.13) ; C1.2 524.05,44.59 v1(551.01,71.54) ; C8.2 935.23,-38.56 v2(935.23,-78.24)
  other v1: 100,-1133.5 350,-1133.5 0.44,-1130.06 -300,-1112.52 -100,-1112.52 200,-1084.73 -200,-977.48 0,-977.48 100,-977.48 200,-977.48 350,-977.48 -529,-975 -61.13,-848.42 -907.86,-770.34 570,-733.61 -974,-697.33 625.69,-675 448.23,-673.59 459.36,-608.82 -952.8,-597.91 -995.21,-489.1 -921.01,-420.74 497.35,-416.73 -937.98,-363.07 498.78,-315.21 -882.4,-282.94 453.1,-265.82 423.66,-219.16 51.76,-216.43 -31.71,-199.47 596.04,-199.47 219.34,-195.24 164.93,-179.8 371.78,-167.57 -872.35,-160 316.48,-149.87 596.04,-132.24 -913.48,-95.04 -949.89,-27.82 669.18,-25.94 -969,46.98 -1005,119 446.14,123.04 583.51,188.46 -977.13,196.73 -957.06,233.59 502.22,270.7 -937.98,302.22 451.15,327.29 -879.48,345.89 407.69,366.52 200,386.35 351.41,393.09 45.95,401.3 134.37,410.75 292.69,425.72 157.08,573.31 539.36,601.99 454.89,676.9 14.43,728.98 213.14,751.94 388.31,760.68 -325.57,796.22 -437.6,910.16 -200,977.48 0,977.48 200,977.48 -100,1112.52 50,1112.52 100,1112.52 200,1112.52
GPIO13: J2.18
HEAT_THERM_BUFF: J2.25
IDS: C3.1 C4.1 C5.1 C6.2 pad.3 R1.1 U1.43 U3.2 | length 1720.5
  Top Layer w10: v1(214.69,713.03) 216.17,714.51 285.27,714.51 U3.2 390.68,716 395.33,711.35 472.31,711.35 491.02,730.06 C4.1 ; v1(496.04,676.9) 496.04,728.98 C4.1 ; pad.3 544.17,1017.29 418.47,891.59 C3.1 432.17,823.85 432.17,796.79 491.02,737.94 C4.1 ; v1(571.77,621.89) 576.64,621.89 583.64,614.89 C5.1 646.68,573.31 684.22,535.78 688.66,535.78 702.36,522.08 C6.2
  Bottom Layer w10: U1.43 102.12,244.63 8.26,338.5 8.26,515.22 186.33,693.3 193.41,693.3 213.14,713.03 v1(214.69,713.03) ; v1(496.04,676.9) 531.23,676.9 568.5,639.63 568.5,625.16 v1(571.77,621.89)
IDS1: J3.39 P3.1 U1.12 | length 2376.1
  Top Layer w10: v1(-857.54,-125.46) -853.9,-125.46 -842.68,-114.24 141.44,-114.24 419.67,163.99 v1(477.4,163.99)
  Bottom Layer w10: P3.1 -1143.26,86.23 -931,-126.04 -896.63,-126.04 -896.06,-125.46 v1(-857.54,-125.46) -836.5,-104.43 -836.5,-48.49 -815.95,-27.94 -776.91,-27.94 J3.39 ; U1.12 404.09,164.72 405.27,164.72 415.32,154.67 463.21,154.67 472.53,163.99 v1(477.4,163.99)
IDS2: J3.40 U1.11 | length 1777
  Top Layer w10: v1(-875.02,-90.27) 130.74,-90.27 416,194.99 490.24,194.99 491.72,193.52 498.78,193.52 v1(502.22,190.07)
  Bottom Layer w10: v1(-875.02,-90.27) -854.5,-69.74 -854.5,-41.04 -820.81,-7.35 J3.40 ; U1.11 386.57,174.54 410.35,198.32 448.15,198.32 450.93,195.54 491.88,195.54 497.35,190.07 v1(502.22,190.07)
IDS3: J3.41 U1.10 | length 1784.4
  Top Layer w10: v1(-896.01,-59.27) 127.02,-59.27 408.5,222.21 480.48,222.21 481.37,223.09 489.05,223.09 v1(492.49,226.54)
  Bottom Layer w10: v1(-896.01,-59.27) -872.5,-35.75 -872.5,-33.58 -826.59,12.33 J3.41 ; U1.10@379.05,194.86 400.51,216.32 477.4,216.32 487.62,226.54 v1(492.49,226.54)
IDS4: J3.42 U1.9 | length 1764
  Top Layer w10: v1(-909.63,-25.94) 118.69,-25.94 397.33,252.7 467.13,252.7 v1(467.64,253.21)
  Bottom Layer w10: v1(-909.63,-25.94) -906.19,-22.5 -906.19,-12.2 -901.78,-7.8 -901.78,-6.52 -863.24,32.02 J3.42@-799.81,32.02 ; U1.9 391.81,235.96 446.14,235.96 463.39,253.21 v1(467.64,253.21)
IDS5: J3.43 U1.8 | length 1816.5
  Top Layer w10: v1@-932.77,5.06 112.29,5.06 377.92,270.7 432.78,270.7 448.23,286.14 v1(453.1,286.14)
  Bottom Layer w10: v1(-932.78,5.04) -927.91,5.04 -922.91,10.04 -919.59,10.04 -877.93,51.7 J3.43 ; U1.8 386.51,258.5 426.05,258.5 453.1,285.55 v1(453.1,286.14)
IDS6: J3.44 U1.7 | length 1747.6
  Top Layer w10: v1(-932.43,41.04) 113.74,41.04 371.78,299.08 416.89,299.08 v1(419.51,301.7)
  Bottom Layer w10: v1(-932.43,41.04) -902.08,71.39 J3.44 ; U1.7 398.43,298.25 416.06,298.25 v1(419.51,301.7)
IDS7: J3.45 U1.6 | length 1744.7
  Top Layer w10: v1(-944.64,74.91) 122.15,74.91 364.32,317.08 380.89,317.08 394.57,330.76 v1(398.26,330.76)
  Bottom Layer w10: v1(-944.64,74.91) -941.2,78.35 -920.57,78.35 -907.86,91.07 J3.45 ; U1.6 316.48,244.63 398.26,326.41 v1(398.26,330.76)
IDS8: J3.46 U1.5 | length 1772.4
  Top Layer w10: v1(-969.9,103.7) -967.7,105.91 127.69,105.91 364.58,342.79 364.58,343.1 372.1,350.61 v1(372.1,355.49)
  Bottom Layer w10: v1(-969.9,103.7) -967.7,105.91 -925.07,105.91 -920.23,110.76 J3.46 ; U1.5 364.58,320.08 364.58,343.1 372.1,350.61 v1(372.1,355.49)
IDS9: J3.47 U1.4 | length 1733.6
  Top Layer w10: v1(-982,150.13) -977.13,150.13 -961.7,134.7 -960.7,134.7 -958.54,132.54 -945.07,132.54 -942.97,130.44 108.59,130.44 333.58,355.43 v1(333.58,355.63)
  Bottom Layer w10: v1(-982,150.13) -977.13,150.13 -961.7,134.7 -957.06,134.7 -952.8,130.44 J3.47 ; U1.4 333.58,316.92 v1(333.58,355.63)
IDS10: J3.48 U1.3 | length 1639.3
  Top Layer w10: v1(-945.7,163.54) 100.71,163.54 301.89,364.73 v1(301.89,385.96)
  Bottom Layer w10: v1(-945.7,163.54) -940.83,163.54 -927.41,150.13 J3.48 ; U1.3 274.72,286.39 302.58,314.25 302.58,385.27 v1(301.89,385.96)
IDS11: J3.49 U1.2 | length 1584.5
  Top Layer w10: v1(-931.76,196.73) -926.89,196.73 -920.84,190.69 102.39,190.69 266.6,354.89 v1(266.6,393.09)
  Bottom Layer w10: v1(-931.76,196.73) -904.84,169.81 J3.49 ; U1.2 270.38,309.39 270.38,310.5 284.58,324.7 284.58,340.36 266.6,358.34 v1(266.6,393.09)
IDS12: J3.50 U1.1 | length 1360.6
  Top Layer w10: v1(-905.81,221.69) 89.55,221.69 v1(213.76,345.89)
  Bottom Layer w10: v1(-905.81,221.69) -873.62,189.5 J3.50 ; v1(213.76,345.89) 245.91,313.74 U1.1
IDS13: J3.51 U1.48 | length 1394.1
  Top Layer w10: v1(-925.88,262.06) -921.01,262.06 -914.09,255.14 77.03,255.14 135.03,313.14 135.03,349.34 v1(157.08,371.39)
  Bottom Layer w10: v1(-925.88,262.06) -922.44,258.61 -913.64,258.61 -913.48,258.45 -898.73,258.45 -849.46,209.18 J3.51 ; v1(157.08,371.39) 157.08,366.52 152.93,362.37 152.93,332.53 U1.48
IDS14: J3.52 U1.47 | length 1337.7
  Top Layer w10: v1(-900.64,289.45) -895.77,289.45 -882.93,276.61 73.04,276.61 117.03,320.6 117.03,371.39 v1(115.14,373.29)
  Bottom Layer w10: v1(-900.64,289.45) -900.64,285.82 -843.69,228.87 J3.52 ; v1(115.14,373.29) 117.03,371.39 117.03,340.58 U1.47
IDS15: J3.53 U1.46 | length 1270.5
  Top Layer w10: v1(-869.56,307.61) -864.69,307.61 -859.3,302.22 73.2,302.22 91.36,320.38 91.36,350.96 74.5,367.82 v1(74.5,372.69)
  Bottom Layer w10: v1(-869.56,307.61) -866.11,304.16 -866.11,292.17 -822.5,248.55 J3.53 ; v1(74.5,372.69) 74.5,367.82 98.11,344.2 98.11,331.66 U1.46
IDS16: J3.54 U1.45 | length 1126.4
  Top Layer w10: v1(-845.21,334.13) -840.34,334.13 -828.58,345.89 v1(47.7,345.89)
  Bottom Layer w10: v1(-845.21,334.13) -845.21,329.26 -838.56,322.6 -838.56,294.69 -812.88,269.02 -776.78,269.02 J3.54 ; v1(47.7,345.89) 48.98,345.89 68.84,326.03 75.91,326.03 U1.45
IDS17: J3.55 U1.25 | length 1148.5
  Bottom Layer w10: J3.55 -563.19,287.92 -143.03,-132.24 107.14,-132.24 U1.25
IDS18: J3.56 U1.26 | length 1133.6
  Bottom Layer w10: J3.56 -545.32,307.61 -123.48,-114.24 97.3,-114.24 U1.26
IDS19: J3.57 U1.27 | length 1118.7
  Bottom Layer w10: J3.57 -535.09,327.29 -111.56,-96.24 87.46,-96.24 U1.27
IDS20: J3.58 U1.28 | length 1103.8
  Bottom Layer w10: J3.58 -516.83,346.98 -91.62,-78.24 77.62,-78.24 U1.28
IDS21: J3.59 U1.29 | length 1088.9
  Bottom Layer w10: J3.59 -506.87,366.66 -79.97,-60.24 67.78,-60.24 U1.29
IDS22: J3.60 U1.30 | length 1073.9
  Bottom Layer w10: J3.60 -501.1,386.35 -72.51,-42.24 57.94,-42.24 U1.30
IDS23: J3.61 U1.31 | length 1059
  Bottom Layer w10: J3.61 -495.33,406.03 -65.06,-24.24 48.1,-24.24 U1.31
IDS24: J3.62 U1.32 | length 1044.1
  Bottom Layer w10: J3.62 -489.55,425.72 -57.6,-6.24 38.26,-6.24 U1.32
IDS25: J3.63 U1.33 | length 1029.2
  Bottom Layer w10: J3.63 -483.78,445.4 -50.15,11.76 27.93,11.76 59.87,43.7 U1.33
IDS26: J3.64 U1.34 | length 1014.3
  Bottom Layer w10: J3.64 -478.01,465.09 -42.69,29.76 18.1,29.76 45.95,57.62 U1.34
IDS27: J3.65 U1.35 | length 999.4
  Bottom Layer w10: J3.65 -459.36,484.77 -22.35,47.76 8.26,47.76 32.03,71.54 U1.35
IDS28: J3.66 U1.36 | length 989.1
  Bottom Layer w10: J3.66 -378.83,504.46 18.6,107.02 18.6,106.74 28.65,96.69 28.65,95.51 U1.36
IDS29: J3.67 U1.37 | length 945.2
  Bottom Layer w10: J3.67 -344.91,524.14 U1.37
IDS30: J3.68 U1.38 | length 961.5
  Bottom Layer w10: J3.68 -336.76,543.83 U1.38
IDS31: J3.69 U1.39 | length 977.8
  Bottom Layer w10: J3.69 -328.61,563.51 U1.39
IDS32: J3.70 P3.2 U1.40 | length 1361
  Bottom Layer w10: P3.2 -989.2,482 -888,583.2 J3.70 -320.45,583.2 U1.40
LOW_BATT: J2.29
MISO: J1.22 R2.2 | length 229.1
  Top Layer w10: J1.22 -150,818.35 -107.5,775.84 R2.2
MOSI: J1.30 J4.5 | length 635.5
  Top Layer w10: v1(-402.99,935.5) -399.55,938.94 -399.55,959.2 -381.26,977.48 J1.30
  Bottom Layer w10: v1(-402.99,935.5) -402.99,791.8 -335.19,724 -206.82,724 -117.53,813.29 J4.5
NetJ4_4: J4.4 R2.1 | length 164.4
  Top Layer w10: R2.1 v1(-0.4,766)
  Bottom Layer w10: J4.4 -38.79,804.39 v1(-0.4,766)
SCAN: J2.27
SCK: J1.20 J4.3 | length 203.7
  Bottom Layer w10: v1(-100,977.48) -100,972.61 -92.27,964.88 -92.27,954.99 -80.39,943.11 -11.16,943.11 39.95,892 J4.3
SOURCE_SEL0: J1.26 U1.15 | length 2237.6
  Top Layer w10: J1.26 -250,890.17 -255.86,884.31 -349.1,884.31 -402.99,830.42 -402.99,751.94 -135.48,484.43 433.74,484.43 656.53,261.65 656.53,30.72 671.02,16.23 v1(671.02,15.86)
  Bottom Layer w10: U1.15 412.85,16.93 412.85,6.91 473.49,-53.73 540.08,-53.73 609.68,15.86 v1(671.02,15.86)
SOURCE_SEL1: J1.25 U1.16 | length 2598.5
  Top Layer w10: J1.25 -259.57,1122.09 -259.57,1172.57 -290,1203 -383.57,1203 -472.24,1114.32 -472.24,795.74 -141.59,465.09 427.63,465.09 629.42,263.3 v1(629.42,-25.9)
  Bottom Layer w10: U1.16 394.85,7.09 394.85,-0.55 466.11,-71.8 583.51,-71.8 v1(629.42,-25.9)
SOURCE_SEL2: J2.17 U1.17 | length 1751.7
  Top Layer w10: J2.17 -40.43,-967.91 -40.43,-916.41 -0.12,-876.1 0.44,-876.1 18.6,-857.94 18.6,-857.38 41.9,-834.08 391.45,-834.08 679.54,-545.99 679.54,-142.87 v1(632.91,-96.24)
  Bottom Layer w10: U1.17 376.85,-2.75 376.85,-8 465.08,-96.24 v1(632.91,-96.24)
SOURCE_SEL3: J2.30 U1.18 | length 2227.1
  Top Layer w10: J2.30 -350,-1084 -359.57,-1074.43 -373.71,-1074.43 -424.38,-1023.76 -424.38,-917.36 -321.12,-814.1 385.97,-814.1 656.53,-543.54 656.53,-206.21 v1(614.01,-163.7)
  Bottom Layer w10: U1.18 330.4,15.37 358.85,-13.08 358.85,-15.46 507.09,-163.7 v1(614.01,-163.7)
SOURCE_SEL4: J2.26 U1.19 | length 2409.5
  Top Layer w10: J2.26 -250,-1155.43 -277.57,-1183 -369.95,-1183 -442.38,-1110.57 -442.38,-909.91 -328.57,-796.1 378.51,-796.1 637.15,-537.46 637.15,-274.75 v1(601.3,-238.89)
  Bottom Layer w10: U1.19 316.48,1.45 556.83,-238.89 v1(601.3,-238.89)
VDS1: J3.7 P4.1 U2.12 | length 2105.7
  Top Layer w10: v1(-873,-755.39) -823.61,-706 205.19,-706 v1(465.19,-446)
  Bottom Layer w10: P4.1 -1016,-598.2 -1016,-713.1 -927.75,-801.34 -895.01,-801.34 -876.44,-782.77 -876.44,-758.83 v1(-873,-755.39) -872.35,-754.74 -872.35,-717.21 -812.88,-657.74 -776.78,-657.74 J3.7 J3.7@-775.22,-657.74 ; U2.12 416.01,-400.71 417.2,-400.71 462.49,-446 v1(465.19,-446)
VDS2: J3.8 U2.11 | length 1839.3
  Top Layer w10: v1(-903.35,-725.56) -902.18,-724.39 -867.46,-724.39 -831.07,-688 172.03,-688 v1(498.75,-361.28)
  Bottom Layer w10: v1(-903.35,-725.56) -903.35,-722.76 -818.65,-638.06 -776.78,-638.06 J3.8 ; U2.11@392.2,-395.59 393.79,-395.59 414,-375.37 479.81,-375.37 493.9,-361.28 v1(498.75,-361.28)
VDS3: J3.9 U2.10 | length 1858.2
  Top Layer w10: v1(-937.98,-694.55) -863.08,-694.55 -838.53,-670 85.78,-670 398.76,-357.03 452.11,-357.03 464.76,-344.37 v1(466.97,-344.37)
  Bottom Layer w10: v1(-937.98,-694.55) -905.89,-694.55 -828.93,-617.59 J3.9 J3.9@-775.22,-618.37 ; U2.10 405.73,-355.32 451.15,-355.32 462.1,-344.37 v1(466.97,-344.37)
VDS4: J3.10 U2.9 | length 1934
  Top Layer w10: v1(-969,-661.68) -967.13,-663.55 -857.54,-663.55 -845.98,-652 76.54,-652 395.33,-333.21 434.29,-333.21 v1(462.13,-305.37)
  Bottom Layer w10: v1(-969,-661.68) -967.13,-663.55 -914.31,-663.55 -849.44,-598.68 -776.78,-598.68 J3.10 ; U2.9 400.31,-332.89 434.6,-332.89 v1(462.13,-305.37)
VDS5: J3.11 U2.8 | length 1799.6
  Top Layer w10: v1(-937.98,-632.55) 67.7,-632.55 385.04,-315.21 405.85,-315.21 v1(426.83,-294.24)
  Bottom Layer w10: v1(-937.98,-632.55) -908.76,-632.55 -854.43,-578.22 J3.11 ; U2.8 407.69,-297.68 423.38,-297.68 v1(426.83,-294.24)
VDS6: J3.12 U2.7 | length 1752.7
  Top Layer w10: v1(-914.5,-594.45) -911.05,-597.89 -900.43,-597.89 -899.64,-598.68 76.11,-598.68 v1(416.89,-257.91)
  Bottom Layer w10: v1(-914.5,-594.45) -911.05,-591.01 -892.67,-591.01 -860.69,-559.02 -776.49,-559.02 J3.12 ; U2.7 330.4,-346.64 416.89,-260.15 v1(416.89,-257.91)
VDS7: J3.13 U2.6 | length 1736.9
  Top Layer w10: v1(-898.12,-552.62) -896.24,-552.62 -883.26,-565.59 67.02,-565.59 388.31,-244.3 v1(388.31,-211.52)
  Bottom Layer w10: v1(-898.12,-552.62) -893.25,-552.62 -879.48,-538.85 J3.13 ; U2.6 385.89,-263.8 385.89,-242.39 387.76,-240.52 387.76,-212.07 v1(388.31,-211.52)
VDS8: J3.14 U2.5 | length 1799.2
  Top Layer w10: v1(-982,-527) -949.89,-527 -942.06,-519.17 87.98,-519.17 352.59,-254.56 352.59,-230.92 v1(356.04,-227.48)
  Bottom Layer w10: v1(-982,-527) -949.89,-527 -942.06,-519.17 J3.14 ; U2.5 356.04,-265.82 v1(356.04,-227.48)
VDS9: J3.15 U2.4 | length 1771.1
  Top Layer w10: v1(-955.83,-489.1) -950.96,-489.1 -938.89,-501.17 80.53,-501.17 325.04,-256.66 325.04,-213.61 338.54,-200.11 v1(338.54,-195.24)
  Bottom Layer w10: v1(-955.83,-489.1) -952.39,-492.54 -946.6,-492.54 -937.98,-501.17 -851.9,-501.17 -849.44,-498.7 -776.78,-498.7 J3.15 ; U2.4 322.22,-271.8 322.22,-216.43 338.54,-200.11 v1(338.54,-195.24)
VDS10: J3.16 U2.3 | length 1659.9
  Top Layer w10: v1(-925.14,-470.17) -923.26,-470.17 -910.26,-483.17 51.76,-483.17 300,-234.92 v1(300,-184.52)
  Bottom Layer w10: v1(-925.14,-470.17) -923.26,-470.17 -910.26,-483.17 -859.36,-483.17 -855.21,-479.02 -776.78,-479.02 J3.16 ; U2.3 302.58,-263.59 302.58,-187.1 v1(300,-184.52)
VDS11: J3.17 U2.2 | length 1508.5
  Top Layer w10: v1(-893.96,-452.17) -890.52,-455.61 -883.25,-455.61 -882.4,-456.46 51.99,-456.46 269,-239.46 269,-216.92 264.25,-212.17 264.25,-207.16 v1(260.8,-203.71)
  Bottom Layer w10: v1(-893.96,-452.17) -893.09,-452.17 -885.15,-460.11 J3.17 ; U2.2 260.8,-277.04 284.58,-253.27 284.58,-228.02 260.8,-204.24 v1(260.8,-203.71)
VDS12: J3.18 U2.1 | length 1303.1
  Top Layer w10: v1(-869.56,-425.46) 39.15,-425.46 v1(224.38,-240.24)
  Bottom Layer w10: v1(-869.56,-425.46) -864.69,-425.46 -849.72,-440.43 J3.18 ; v1(224.38,-240.24) 246.88,-262.75 U2.1
VDS13: J3.19 U2.48 | length 1371
  Top Layer w10: v1(-903.35,-387.04) -899.91,-390.48 -855.74,-390.48 -847.16,-399.07 22.9,-399.07 147.96,-274.01 147.96,-257.91 v1(186.71,-219.16)
  Bottom Layer w10: v1(-903.35,-387.04) -899.91,-390.48 -860.69,-390.48 -830.44,-420.74 J3.19 ; U2.48 186.71,-248.63 v1(186.71,-219.16)
VDS14: J3.20 U2.47 | length 1393.3
  Top Layer w10: v1(-899.43,-347.12) -895.82,-347.12 -870.45,-372.48 -848.29,-372.48 -839.7,-381.07 15.44,-381.07 129.96,-266.55 v1(129.96,-199.47)
  Bottom Layer w10: v1(-899.43,-347.12) -874.07,-372.48 -853.24,-372.48 -824.67,-401.06 J3.20 ; v1(129.96,-199.47) 129.96,-249.69 U2.47
VDS15: J3.21 U2.46 | length 1296.5
  Top Layer w10: v1(-873,-322.32) -832.24,-363.07 7.99,-363.07 102.12,-268.94 102.12,-238.89 88.2,-224.97 v1(88.2,-224.03)
  Bottom Layer w10: v1(-873,-322.32) -869.56,-325.76 -869.56,-330.71 -818.9,-381.37 J3.21 ; v1(88.2,-224.03) 91.65,-227.48 91.65,-239.22 U2.46
VDS16: J3.22 U2.45 | length 1119.7
  Top Layer w10: v1(-843.21,-302.1) -799.03,-257.91 v1(60.36,-257.91)
  Bottom Layer w10: v1(-843.21,-302.1) -842,-303.31 -842,-331.79 -812.88,-360.91 -776.78,-360.91 J3.22 ; v1(60.36,-257.91) 63.81,-261.35 85.94,-261.35 U2.45
VDS17: J3.23 U2.25 | length 1126.7
  Bottom Layer w10: J3.23 -728,-342 -360.41,-709.59 107.14,-709.59 U2.25
VDS18: J3.24 U2.26 | length 1111.8
  Bottom Layer w10: J3.24 -695.28,-322.32 -326.01,-691.59 97.3,-691.59 U2.26
VDS19: J3.25 U2.27 | length 1096.9
  Bottom Layer w10: J3.25 -666.01,-302.63 -295.05,-673.59 87.46,-673.59 U2.27
VDS20: J3.26 U2.28 | length 1075.5
  Bottom Layer w10: J3.26 -631.3,-282.94 -258.66,-655.59 77.62,-655.59 124.6,-608.61 U2.28@125.71,-608.61
VDS21: J3.27 U2.29 | length 1067.1
  Bottom Layer w10: J3.27 -608.89,-263.26 -234.56,-637.59 67.78,-637.59 U2.29
VDS22: J3.28 U2.30 | length 1052.2
  Bottom Layer w10: J3.28 -590.55,-243.57 -214.54,-619.59 57.94,-619.59 U2.30
VDS23: J3.29 U2.31 | length 1038.2
  Bottom Layer w10: J3.29@-776,-224.67 -774.44,-223.11 -572.09,-223.11 -193.61,-601.59 48.1,-601.59 U2.31
VDS24: J3.30 U2.32 | length 1022.3
  Bottom Layer w10: J3.30 -547.73,-204.2 -168.34,-583.59 38.26,-583.59 U2.32
VDS25: J3.31 U2.33 | length 1007.4
  Bottom Layer w10: J3.31 -530.31,-184.52 -149.24,-565.59 27.93,-565.59 59.87,-533.65 U2.33
VDS26: J3.32 U2.34 | length 992.5
  Bottom Layer w10: J3.32 -501.33,-164.83 -118.57,-547.59 18.1,-547.59 45.95,-519.73 U2.34
VDS27: J3.33 U2.35 | length 977.6
  Bottom Layer w10: J3.33 -480.31,-145.15 -95.87,-529.59 8.26,-529.59 32.03,-505.81 U2.35
VDS28: J3.34 U2.36 | length 958.5
  Bottom Layer w10: J3.34 -378.33,-125.46 2.76,-506.56 3.94,-506.56 U2.36
VDS29: J3.35 U2.37 | length 923.4
  Bottom Layer w10: J3.35 -292.34,-105.78 U2.37
VDS30: J3.36 U2.38 | length 939.7
  Bottom Layer w10: J3.36 -284.19,-86.09 U2.38
VDS31: J3.37 U2.39 | length 956
  Bottom Layer w10: J3.37 -276.04,-66.41 U2.39
VDS32: J3.38 P4.2 U2.40 | length 1544.5
  Bottom Layer w10: P4.2 -1092.79,-456.62 -1092.79,-425.9 -818.5,-151.61 -818.5,-111.88 -818.5,-55.95 -810.18,-47.63 -776.91,-47.63 J3.38 -267.88,-46.72 U2.40
VDS_BUFF: J1.09 U2.43 U3.6 U3.7 | length 2750.7
  Top Layer w10: v1(4.26,-219.16) 84.42,-139 175.8,-139 388.53,73.73 444.34,73.73 546.03,175.41 546.03,212.86 v1(549.47,216.3) ; J1.09 150,1155.43 197.57,1203 358.09,1203 413.47,1147.61 413.47,928.47 391.41,906.41 253.76,906.41 194.06,846.71 194.06,828.33 131.73,766 U3.6 U3.7 131.89,716 163.04,684.86 v1(163.04,614.89)
  Bottom Layer w10: v1(4.26,-219.16) 4.26,-273.53 26.53,-295.8 64.71,-295.8 U2.43 ; v1(163.04,614.89) 276.48,501.45 467.64,501.45 551.01,418.08 551.01,217.84 v1(549.47,216.3)
VDS_RAW: J1.10 U3.5 | length 199.5
  Top Layer w10: U3.5 130.69,816 150,835.31 J1.10
VMEAS: J1.12 R1.2 S1.8 U3.1 | length 1036.6
  Top Layer w10: v1(266.6,875.41) 173.22,782.03 173.22,710.66 217.87,666 U3.1 292.69,660.07 344.46,660.07 354.21,650.32 395.33,650.32 402.22,643.43 549.47,643.43 614.01,707.97 629.42,707.97 S1.8
  Bottom Layer w10: v1(100,977.48) 134.37,943.11 232.67,943.11 263.16,912.63 263.16,878.86 v1(266.6,875.41)
pads on no net: J3.71 J3.72 J3.73 J3.74 J3.75 J3.76 J3.77 J3.78 J3.79 J3.80 J3.81 J3.82 J3.83 J3.84 J4.7 J4.8 S1.1 S1.2 S1.3 S1.4 S1.5 U1.41 U1.42 U1.44 U2.41 U2.42 U2.44

## Polygon pours and split planes (outlines as drawn)
GND on Layer 1 (split plane): 265 vertices, not listed, extent -1279.99,-1279.99 1279.99,1279.99
GND on Layer 2 (split plane): 265 vertices, not listed, extent -1279.99,-1279.99 1279.99,1279.99

## Silkscreen, mask and mechanical layers (free items; w line width, h text height)
Top Overlay:
  lines w10: 837.93,500.22 871.08,500.22 871.08,465.09 ; 866.91,494.52 807.06,434.66 807.06,249.06 898.92,157.19 898.92,154.67
  text "IDS" at 466.15,1020.33 h30
  text "32" at -1078.79,563.38 h30
  text "IDS" at -1061,396 h30
  text "1" at -1174.76,294.92 h30
  text "POLE FREQ" at 922.59,130.44 h30
  text "500Hz" at 969.92,64.72 h30
  text "Breathalyzer- Multiplexer" at -624,63.99 h60
  text "5kHz" at 969.92,11.02 h30
  text "50kHz" at 969.92,-44.14 h30
  text "500kHz" at 969.92,-98 h30
  text "Neel Mondal         Palacios Group, MIT   April 2023" at -626.04,-195.69 h40
  text "32" at -1153.87,-392.07 h30
  text "VDS" at -1035.64,-451.39 h30
  text "1" at -1024,-650.74 h30
  text "4" at 1007,-741.9 h30
  text "GATES" at 590.48,-818.51 h30
  text "5" at 949.74,-818.51 h30
  text "6" at 872,-896 h30
  text "1" at 745.02,-1016.15 h30
  text "2" at 653.92,-1070.44 h30
  text "3" at 546.36,-1123.06 h30
Board:
  circle w5: c0,0 r1300